# Altium PCB PCB1.PcbDoc (part 1 of 2)
Units mm, origin at the board's own origin, x right, y up, seen from the top; angles counter-clockwise.
Board outline 105 x 110 mm, 4 copper layers (Top Layer, Layer 1, Layer 2, Bottom Layer), stack 0.603 mm thick; 82 components, 77 nets, 297 pads, 49 vias.
Unrouted connection lines stored in the file: 1.
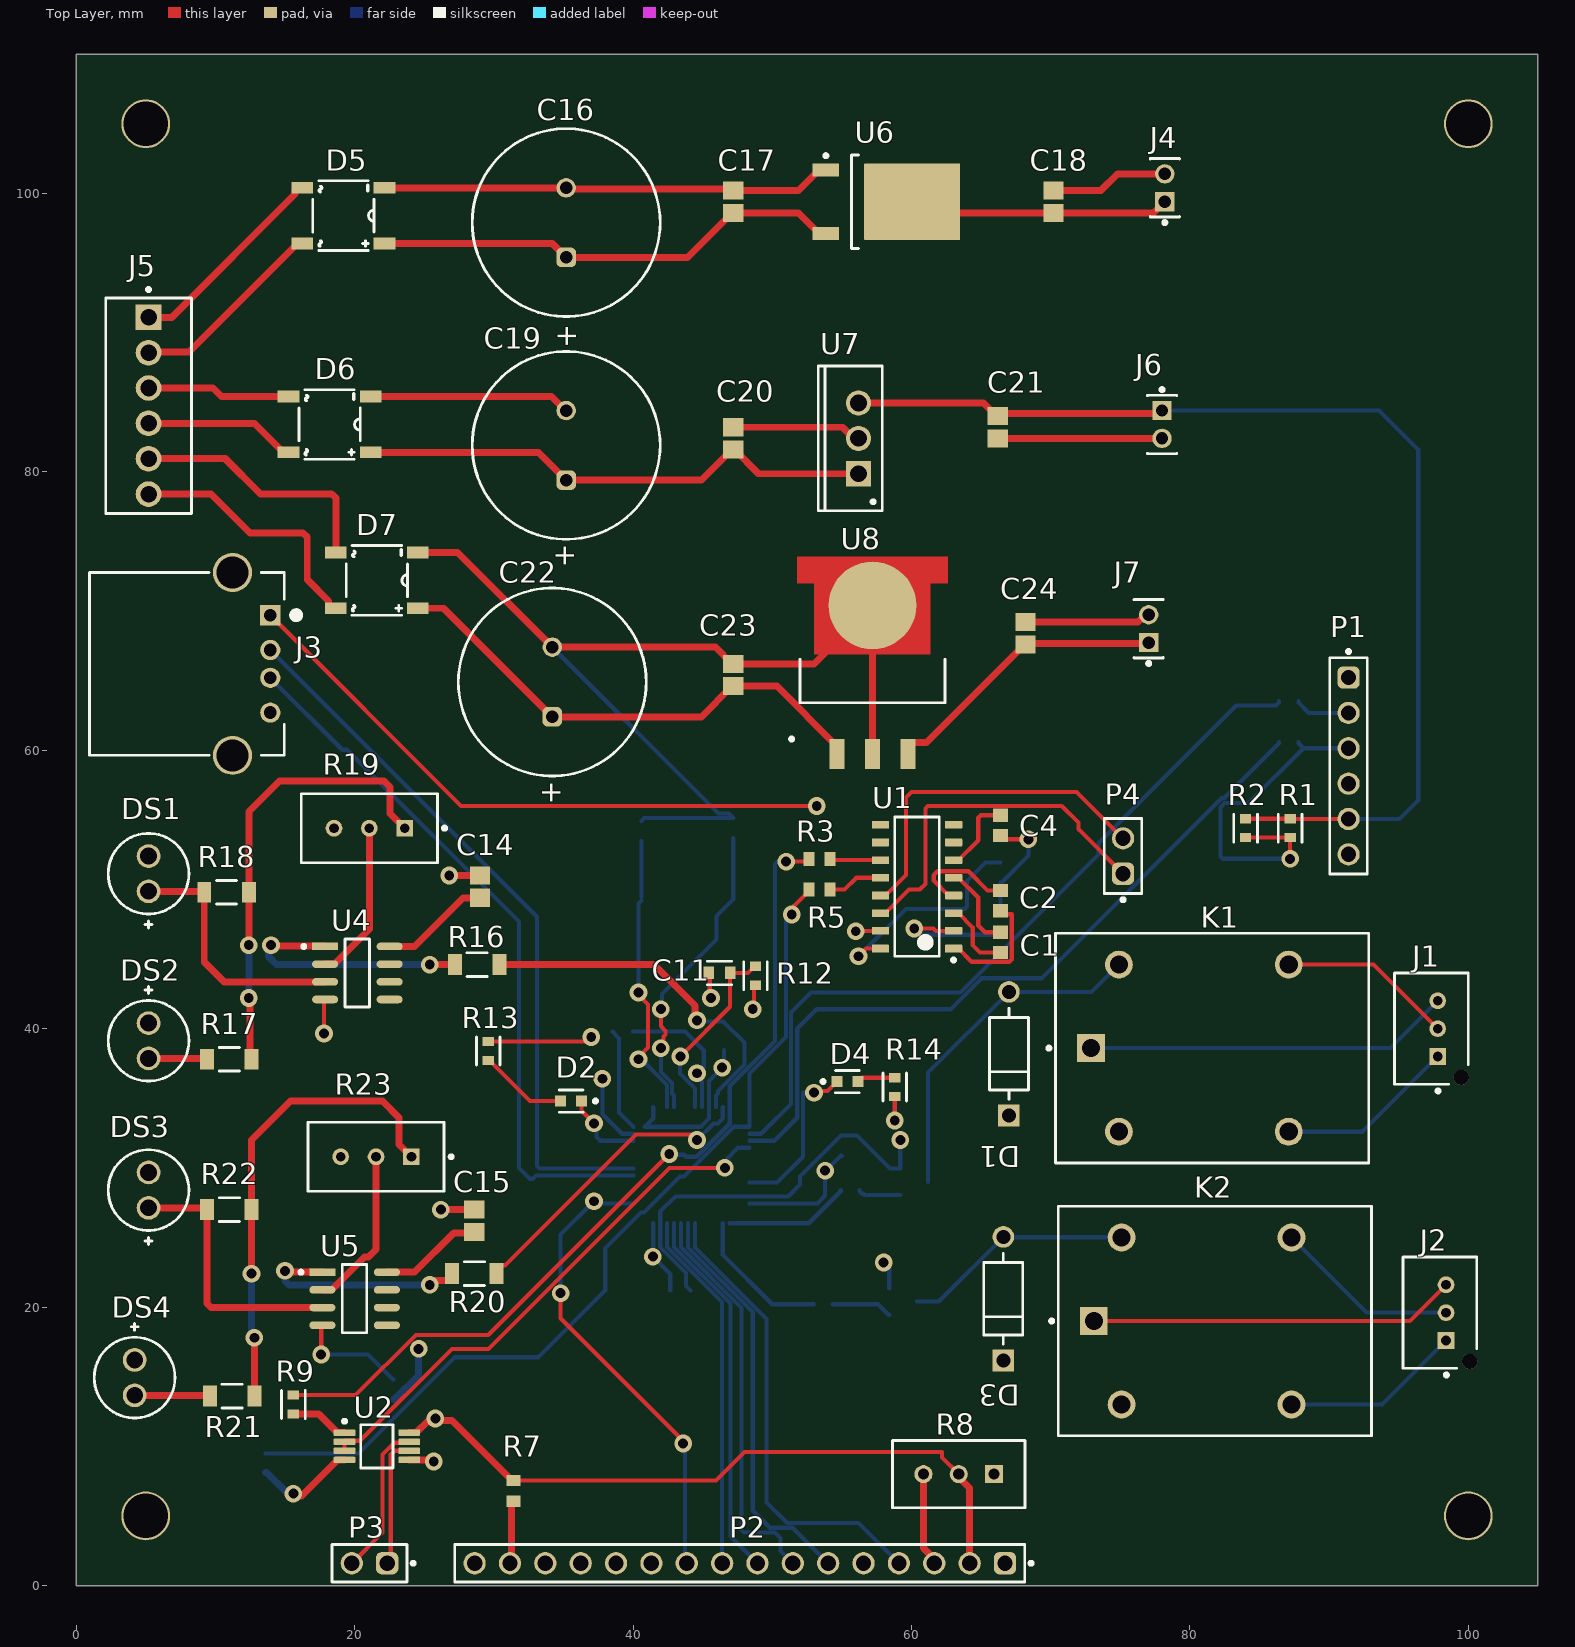
[diagram p0: Top Layer view]
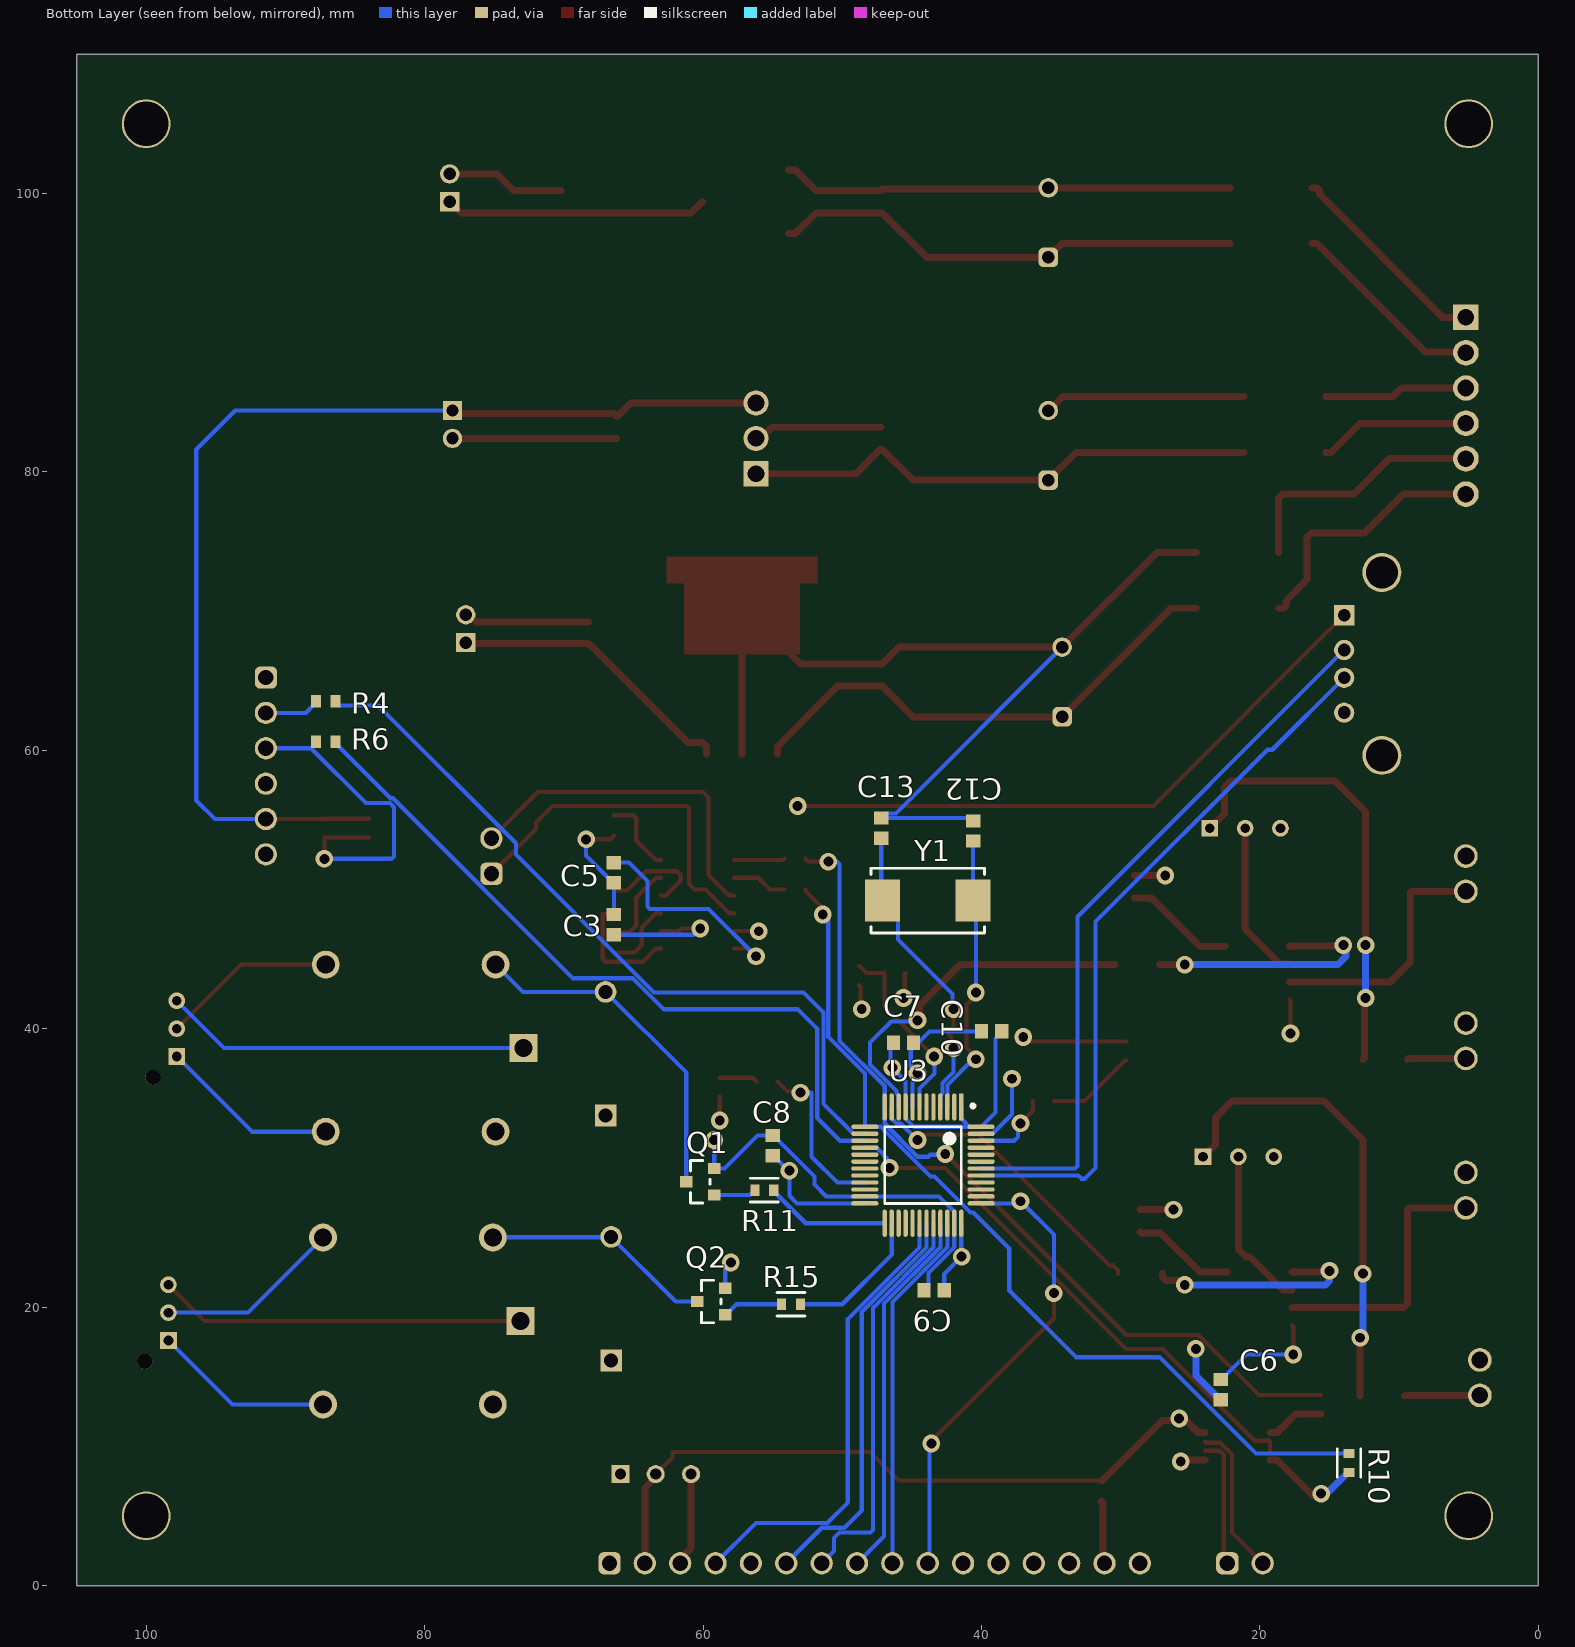
[diagram p1: Bottom Layer view, seen from below]
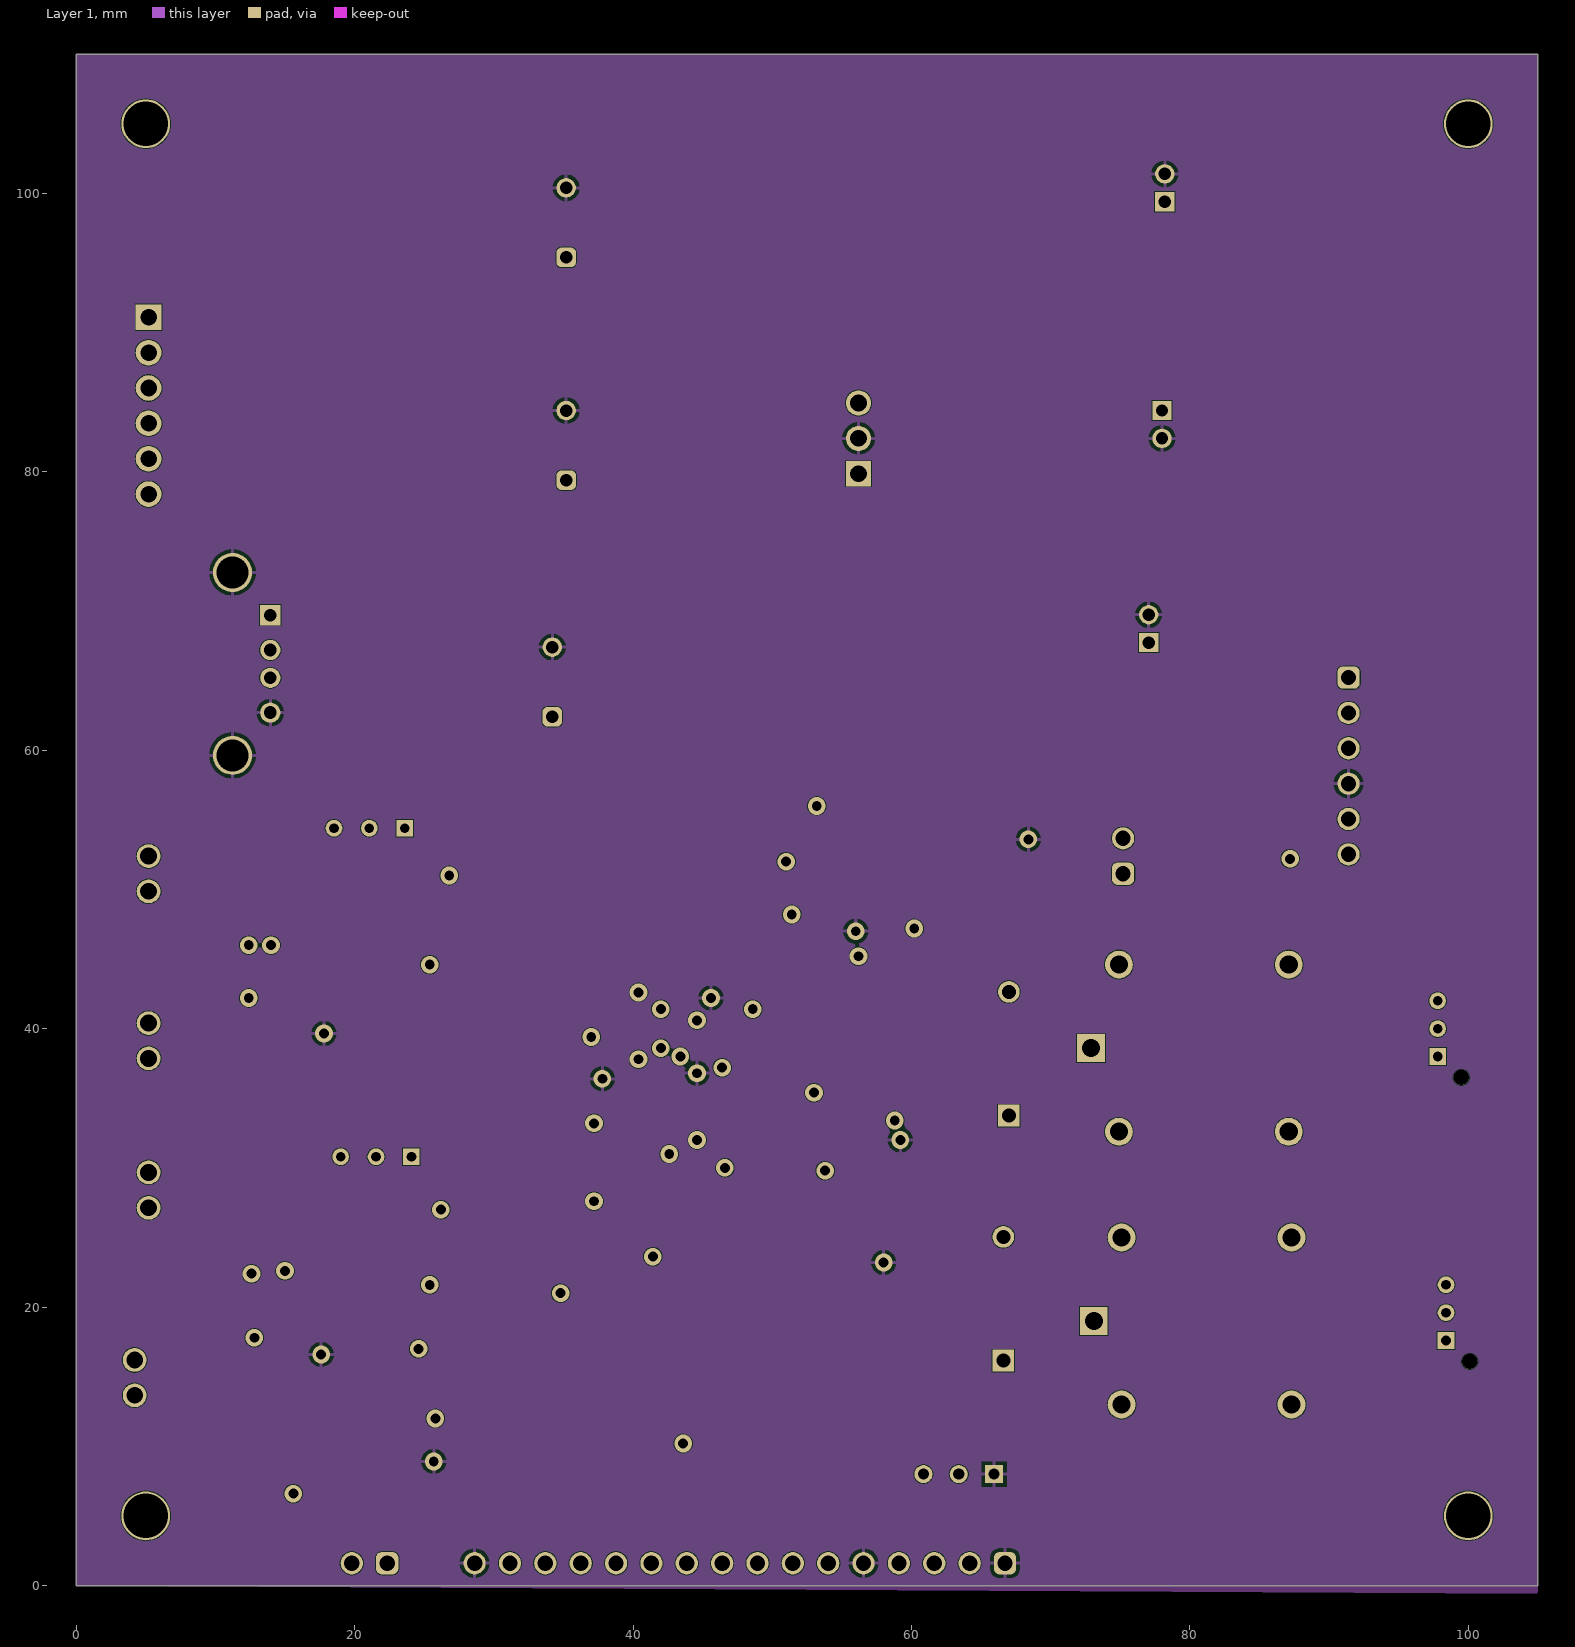
[diagram p2: Layer 1]
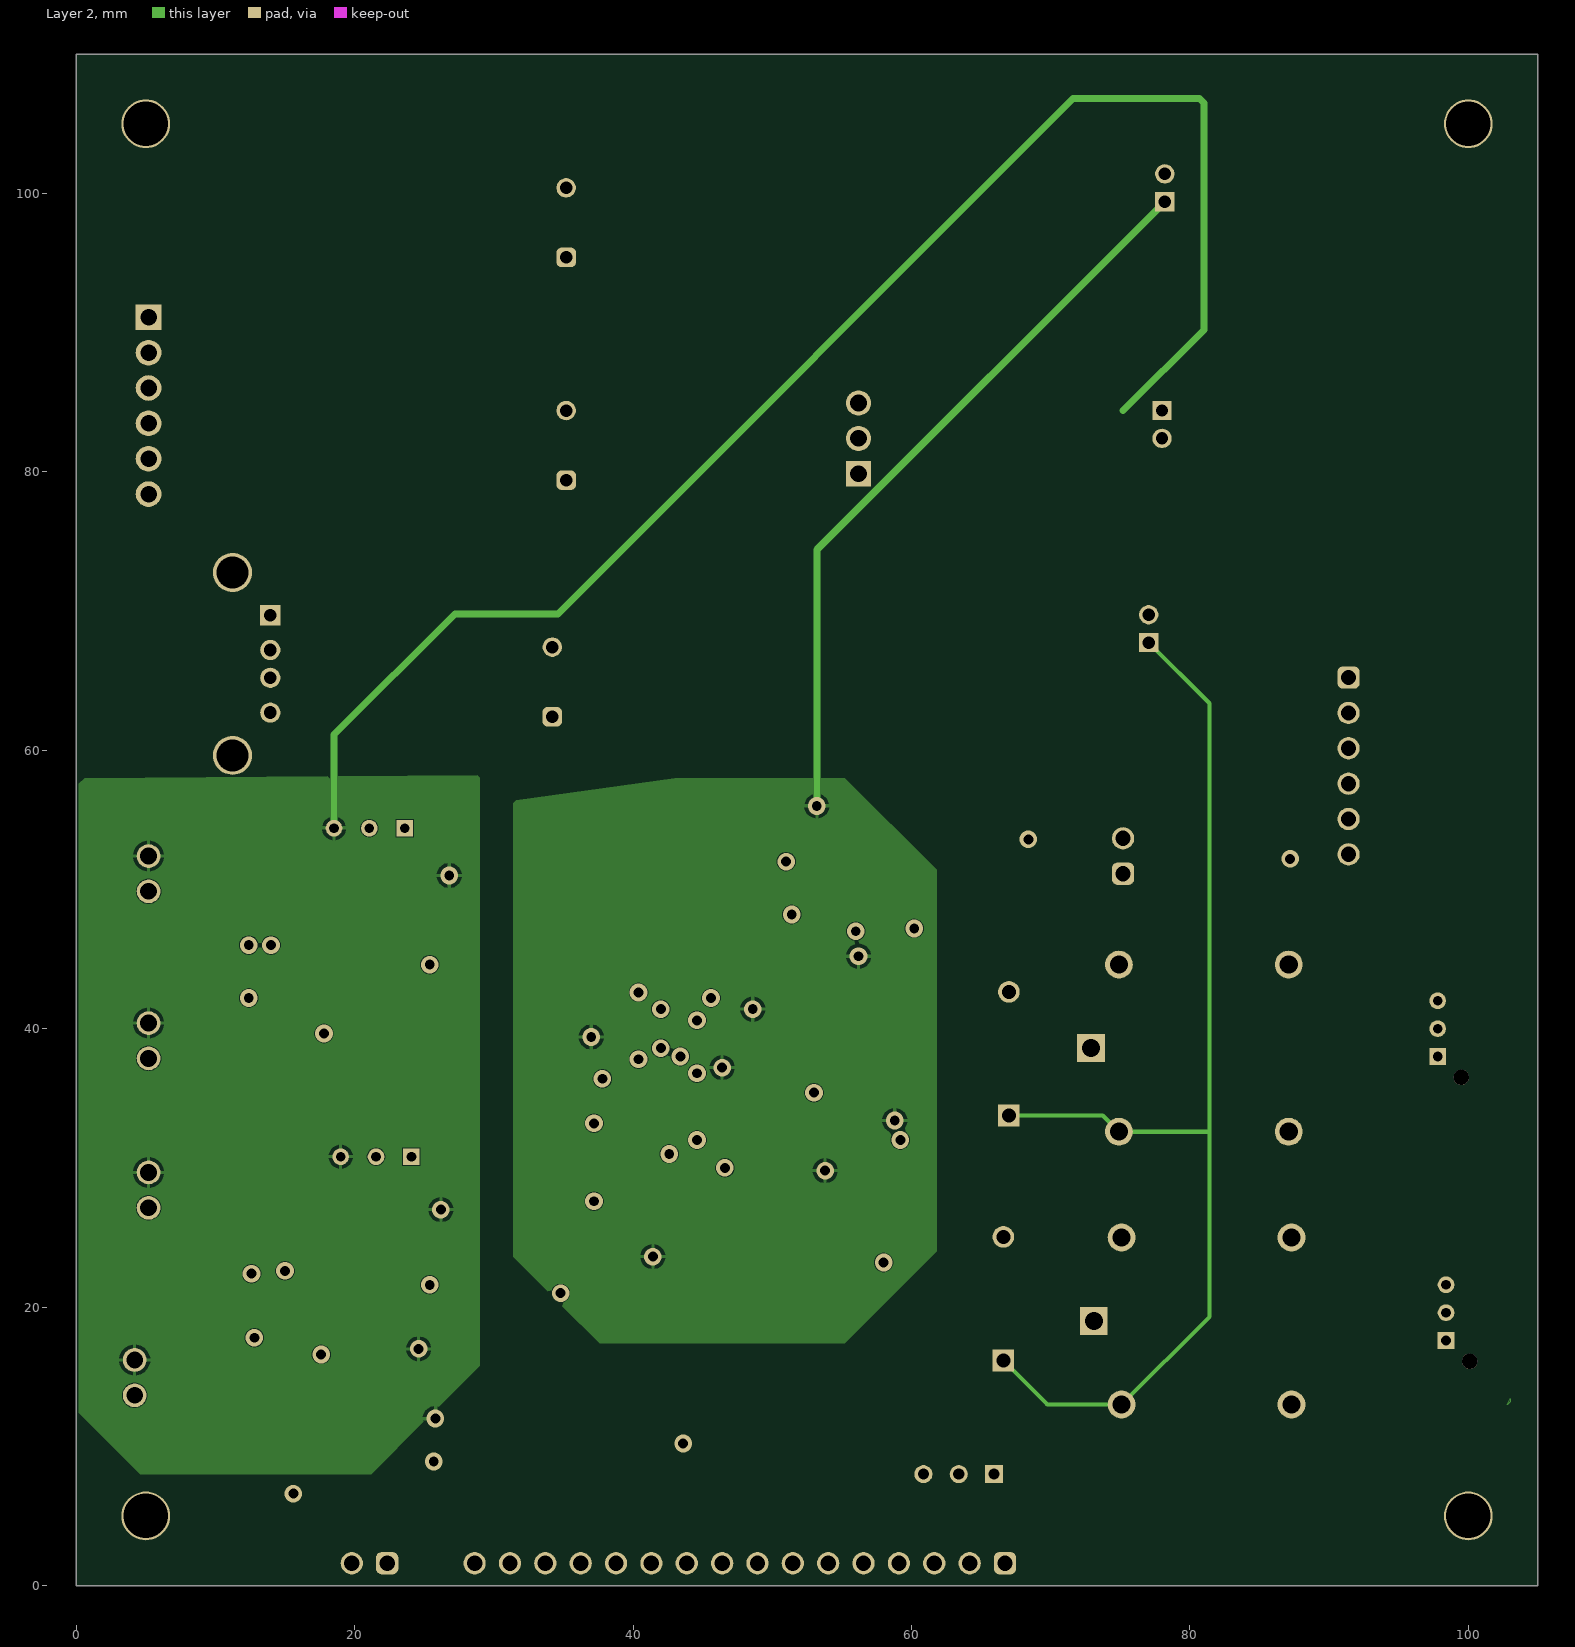
[diagram p3: Layer 2]
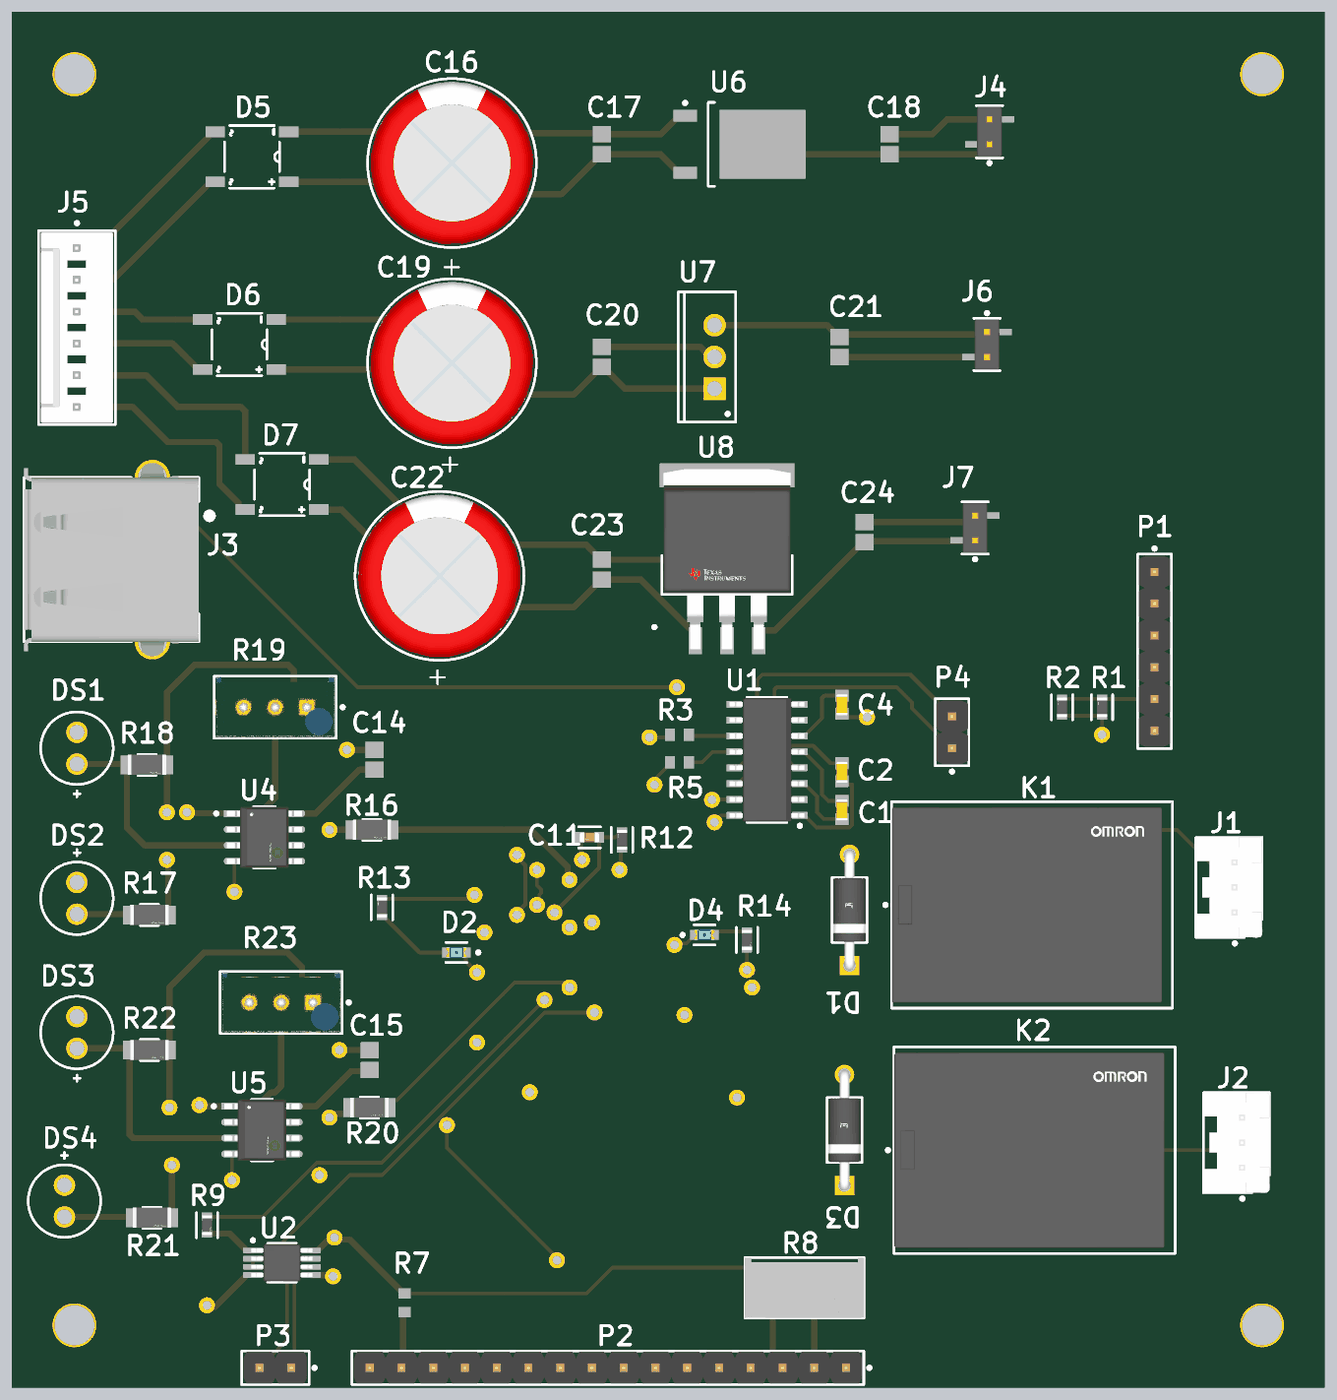
[diagram p4: 3D render of the assembled board from above, using the file's embedded part models]
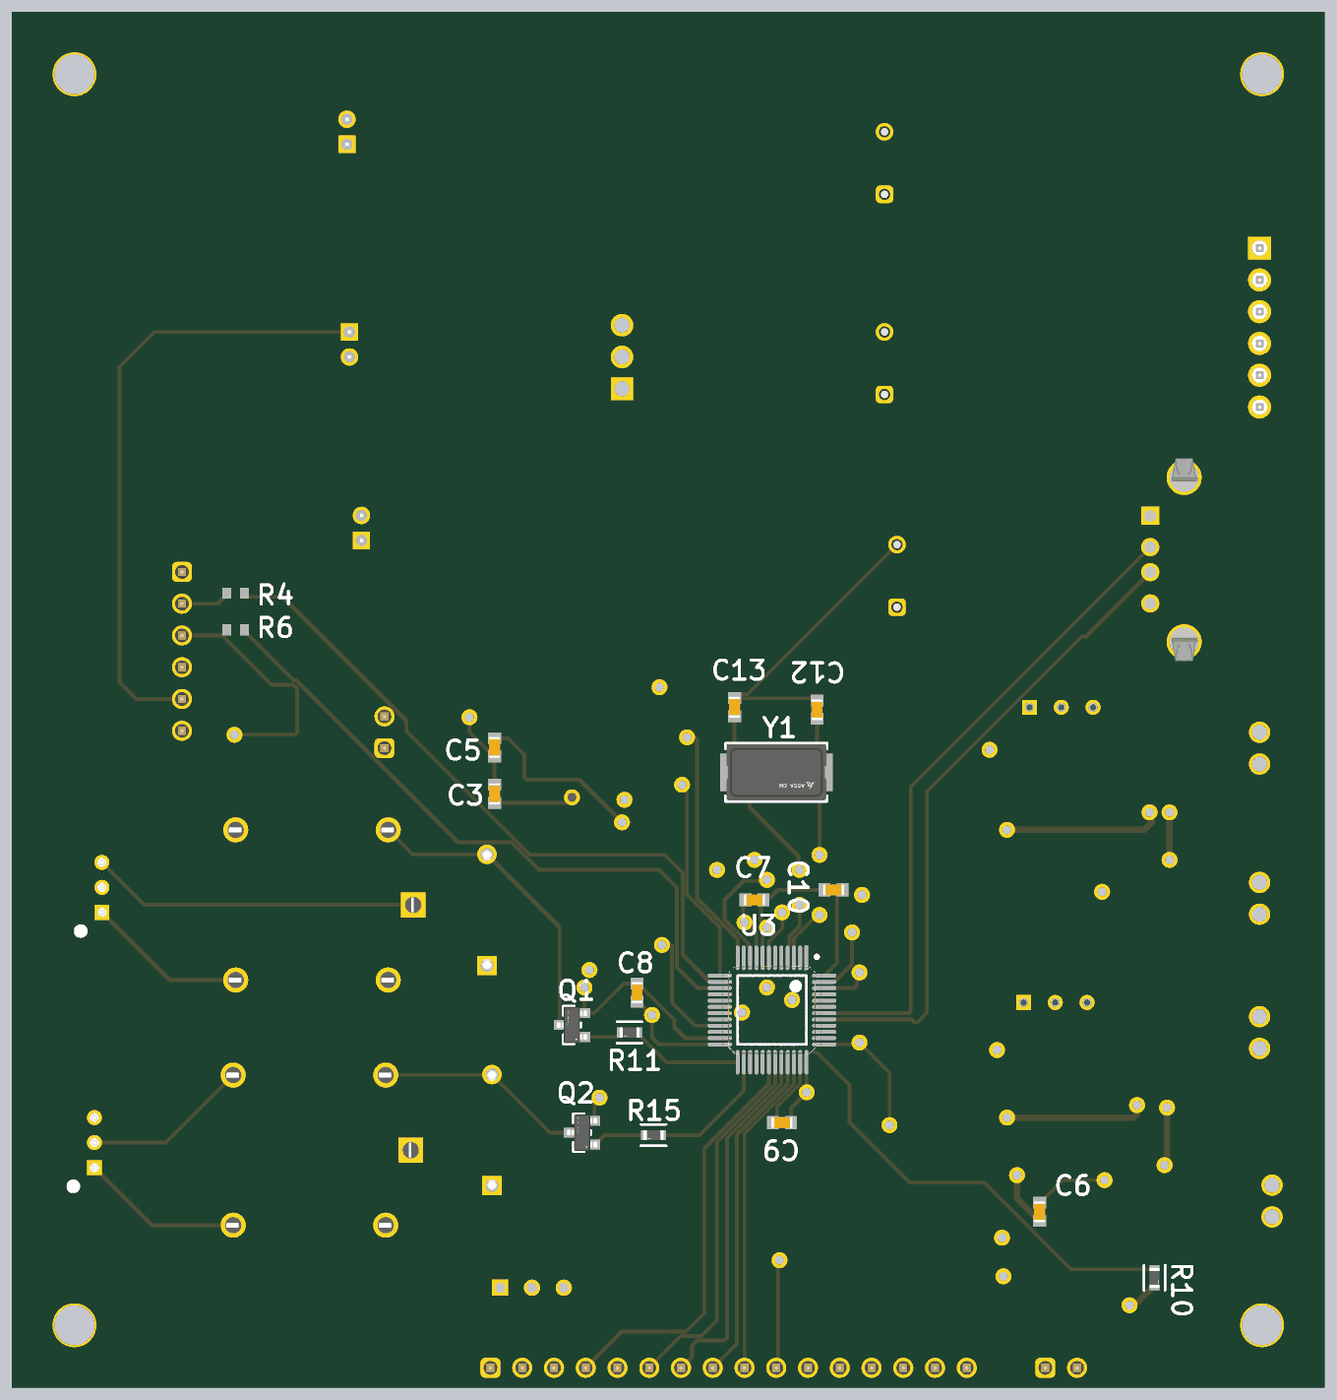
[diagram p5: 3D render of the assembled board from below, using the file's embedded part models]

## Layer stack, top to bottom
Top Solder: solder mask 0.0102, Solder Resist, Dk 3.5
Top Layer: signal copper 0.0356
Dielectric 2: prepreg 0.0711, PP-006, Dk 4.1
Layer 1: signal copper 0.035
Dielectric 1: dielectric 0.32, FR-4, Dk 4.8
Layer 2: signal copper 0.035
Dielectric 3: prepreg 0.0711, PP-006, Dk 4.1
Bottom Layer: signal copper 0.0356
Bottom Solder: solder mask 0.0102, Solder Resist, Dk 3.5

## Board outline
0,0 105,0 105,110 0,110

## Design rules (kind name [scope] priority, off if disabled: settings)
Clearance [All] p1: gap=0.05 ignorepadtopadclearanceinfootprint=FALSE
PlaneConnect [All] p1: planeconnectstyle=Direct reliefexpansion=0.508 reliefentries=4 reliefconductorwidth=0.254 reliefairgap=0.254
PolygonConnect [All] p1: connectstyle=Relief reliefconductorwidth=0.254 reliefentries=4 polygonreliefangle="90 Angle" airgapwidth=0.254
RoutingVias [All] p1: holewidth=0.711 width=1.27 viastyle="Through Hole" minholewidth=0.711 minwidth=1.27 maxholewidth=0.711 maxwidth=1.27
SolderMaskExpansion [All] p1: expansion=0 istentingtop=FALSE
SupplyNets "Schematic Supply Nets_3" [InNet('+12')] p1: voltage=0.000
SupplyNets "Schematic Supply Nets_2" [InNet('+5')] p2: voltage=0.000
SupplyNets "Schematic Supply Nets_1" [InNet('+3.3')] p3: voltage=0.000
SupplyNets "Schematic Supply Nets" [InNet('GND')] p4: voltage=0.000
Width [All] p1: maxlimit=5 minlimit=0.254 preferedwidth=0.5
29 further rules are at their usual default settings.

## Classes and differential pairs
component class "Power Supply": C16 C17 C18 C19 C20 C21 C22 C23 C24 D5 D6 D7 J4 J5 J6 J7 U6 U7 U8
component class "MCU, Relays & USB": C7 C8 C9 C10 C11 C12 C13 D1 D2 D3 D4 J1 J2 J3 K1 K2 Q1 Q2 R11 R12 R13 R14 R15 U3 Y1
component class "Communication & Display": C1 C2 C3 C4 C5 C6 P1 P2 P3 P4 R1 R2 R3 R4 R5 R6 R7 R8 R9 R10 U1 U2
component class "Analog Front-End": C14 C15 DS1 DS2 DS3 DS4 R16 R17 R18 R19 R20 R21 R22 R23 U4 U5

## Components (designator, comment, footprint, x,y, rotation, side; value= is the part's Value field where it differs from the comment)
C1 "0.1uF" CAPC1608X90X35ML10T15 66.4,46.2 r270 top
C2 "0.1uF" CAPC1608X90X35ML10T15 66.4,49.2 r270 top
C3 "0.1uF" CAPC1608X90X35ML10T15 66.4,47.475 r90 bottom
C4 "0.1uF" CAPC1608X90X35ML10T15 66.4,54.6 r270 top
C5 "0.1uF" CAPC1608X90X35ML10T15 66.4,51.2 r90 bottom
C6 "0.1uF" CAPC1608X90X35ML10T15 22.8,14.075 r90 bottom
C7 "0.1uF" CAPC1608X90X35ML10T15 45.6,39 r180 bottom
C8 "0.1uF" CAPC1608X90X35ML10T15 55,31.6 r90 bottom
C9 "0.1uF" CAPC1608X90X35ML10T15 43.4,21.2 r0 bottom
C10 "0.1uF" CAPC1608X90X35ML10T15 39.275,39.8 r0 bottom
C11 "10uF" FP-GRM18-0_15-MFG 46.2,44 r180 top
C12 "22pF" CAPC1608X90X35ML10T15 40.6,54.2 r90 bottom
C13 "22pF" CAPC1608X90X35ML10T15 47.2,54.4 r90 bottom
C14 "0.1uF" CAPC2013X145X50NL20T25 29,50.2 r270 top
C15 "0.1uF" CAPC2013X145X50NL20T25 28.6,26.2 r270 top
C16 "470uF" WCAP-ATLI_D13H25 35.2,97.9 r270 top
C17 "0.IuF" CAPC2013X145X50NL20T25 47.2,99.4 r270 top
C18 "0.1uF" CAPC2013X145X50NL20T25 70.2,99.4 r270 top
C19 "470uF" WCAP-ATLI_D13H25 35.2,81.9 r270 top
C20 "0.1uF" CAPC2013X145X50NL20T25 47.2,82.4 r270 top
C21 "0.1uF" CAPC2013X145X50NL20T25 66.2,83.2 r90 top
C22 "470uF" WCAP-ATLI_D13H25 34.2,64.9 r270 top
C23 "0.1uF" CAPC2013X145X50NL20T25 47.2,65.4 r270 top
C24 "0.1uF" CAPC2013X145X50NL20T25 68.2,68.4 r270 top
D1 "1N4007" FP-1N4007-MFG 67,38.2 r90 top value=15pF
D2 "LTST-C191TBKT" FP-LTST-C191TBKT-MFG 35.55,34.8 r180 top
D3 "1N4007" FP-1N4007-MFG 66.6,20.6 r90 top value=15pF
D4 "LTST-C191TBKT" FP-LTST-C191TBKT-MFG 55.4,36.2 r0 top
D5 "MDB6S" FAIR-MDBXS-4_V 19.2,98.4 r90 top
D6 "MDB6S" FAIR-MDBXS-4_V 18.2,83.4 r90 top
D7 "MDB6S" FAIR-MDBXS-4_V 21.6,72.2 r90 top
DS1 "IR_RX1" VISH-TSAL6200 5.2,51.13 r90 top
DS2 "IR_TX1" VISH-TSAL6200 5.2,39.13 r270 top
DS3 "IR_RX1" VISH-TSAL6200 5.2,28.4 r90 top
DS4 "IR_TX1" VISH-TSAL6200 4.2,14.93 r270 top
J1 "B03B-PASK-1(LF)(SN)" FP-B03B-PASK-1_LF_SN-MFG 97.35,40 r270 top
J2 "B03B-PASK-1(LF)(SN)" FP-B03B-PASK-1_LF_SN-MFG 97.95,19.6 r270 top
J3 "292303-1" TE-292303-1_V 12.8,66.2 r270 top
J4 "TMM-102-03-F-S" FP-TMM-102-03-F-S-MFG 78.2,100.4 r90 top
J5 "22-27-2061" FP-22-27-2061-MFG 5.2,84.75 r270 top
J6 "TMM-102-03-F-S" FP-TMM-102-03-F-S-MFG 78,83.4 r270 top
J7 "TMM-102-03-F-S" FP-TMM-102-03-F-S-MFG 77.042,68.734 r90 top
K1 "G5LE-1-E DC12" FP-G5LE-1-E_DC12-MFG 81.6,38.6 r180 top
K2 "G5LE-1-E DC12" FP-G5LE-1-E_DC12-MFG 81.8,19 r180 top
P1 "61300611121" 61300611121 91.4,58.87 r270 top
P2 "61301611121" 61301611121 47.67,1.6 r180 top
P3 "61300211121" 61300211121 21.07,1.6 r180 top
P4 "61300211121" 61300211121 75.2,52.4 r90 top
Q1 "SBC847CLT1G" FP-318-08-MFG 60.2,29 r0 bottom
Q2 "SBC847CLT1G" FP-318-08-MFG 59.4,20.4 r0 bottom
R1 "10K" FP-RC0603-0_55-IPC_C 87.2,54.4 r90 top
R2 "10K" FP-RC0603-0_55-IPC_C 84,54.4 r90 top
R3 "0E" RESC1608X55X25ML10T15 53.4,52.2 r0 top
R4 "330R" RESC1608X55X25NL10T15 87.1,63.519 r180 bottom
R5 "0E" RESC1608X55X25ML10T15 53.4,50 r0 top
R6 "330R" RESC1608X55X25NL10T15 87.1,60.6 r180 bottom
R7 "0E" RESC1608X55X25ML10T15 31.4,6.8 r270 top
R8 "3296W-1-102LF" BOUR-3296W-1-3 63.4,8 r180 top
R9 "1K" FP-RC0603-0_55-IPC_C 15.6,13 r270 top
R10 "1K" FP-RC0603-0_55-IPC_C 13.6,8.8 r270 bottom
R11 "10K" FP-RC0603-0_55-IPC_C 55.6,28.4 r0 bottom
R12 "1K" FP-RC0603-0_55-IPC_C 48.8,43.8 r90 top
R13 "10K" FP-RC0603-0_55-IPC_C 29.6,38.4 r90 top
R14 "10K" FP-RC0603-0_55-IPC_C 58.8,35.8 r270 top
R15 "10K" FP-RC0603-0_55-IPC_C 53.677,20.2 r0 bottom
R16 "300R" FP-AC1206-MFG 28.8,44.6 r0 top value=6.2KΩ
R17 "100R" FP-AC1206-MFG 11,37.8 r0 top value=6.2KΩ
R18 "1k" FP-AC1206-MFG 10.8,49.8 r0 top value=6.2KΩ
R19 "10k" FP-3296W-MFG 21.06,54.395 r90 top
R20 "300R" FP-AC1206-MFG 28.6,22.4 r0 top value=6.2KΩ
R21 "100R" FP-AC1206-MFG 11.2,13.6 r0 top value=6.2KΩ
R22 "1k" FP-AC1206-MFG 11,27 r0 top value=6.2KΩ
R23 "10k" FP-3296W-MFG 21.54,30.795 r90 top
U1 "MAX3232CDR" D0016A_L 60.4,50.2 r180 top
U2 "SN65HVD3082EDGKR" DGK0008A_M 21.6,10 r0 top
U3 "STM32F030CCT6TR" FP-LQFP48-5B-IPC_A 44.2,30.2 r270 bottom
U4 "LM358DR2G" FP-751-07-IPC_C 20.2,44 r0 top
U5 "LM358DR2G" FP-751-07-IPC_C 20,20.6 r0 top
U6 "LM1117DTX-1.8/NOPB" NDP0003B_N 58.2,99.4 r0 top
U7 "L7805CP" TO220FP 56.2,82.4 r90 top
U8 "LM7812S/NOPB" FP-KTT0003B-MFG 57.2,66.27 r0 top
Y1 "ABM2-14.31818MHZ-D4Y-T" FP-ABM2-MFG 43.85,49.2 r0 bottom

## Footprints (in the part's own frame and the unit in brackets; to place one, negate y for a bottom-side part, rotate by r counter-clockwise, add the part's x,y. Pads: shape width x height; smd on the part's side, far side on the other; paste and mask are expansions set on the pad)
61300211121 [mm] "Pin Header, pitch 2.54 mm, THT, Vertical, single row, 2p"
  rrect50% 1.6x1.6 hole 1.1: 1(-1.27,0)
  round 1.6 hole 1.1: 2(1.27,0)
  silkscreen extent -3.26,-1.35 2.69,1.35, body extent -2.54,-1.27 2.54,1.27, height 8.57
61300611121 [mm] "Pin Header, pitch 2.54 mm, THT, Vertical, single row, 6p"
  rrect50% 1.6x1.6 hole 1.1: 1(-6.35,0)
  round 1.6 hole 1.1: 2(-3.81,0) 3(-1.27,0) 4(1.27,0) 5(3.81,0) 6(6.35,0)
  silkscreen extent -8.34,-1.35 7.77,1.35, body extent -7.62,-1.27 7.62,1.27, height 8.57
61301611121 [mm] "Pin Header, pitch 2.54 mm, THT, Vertical, single row, 16p"
  rrect50% 1.6x1.6 hole 1.1: 1(-19.05,0)
  round 1.6 hole 1.1: 2(-16.51,0) 3(-13.97,0) 4(-11.43,0) 5(-8.89,0) 6(-6.35,0) 7(-3.81,0) 8(-1.27,0) 9(1.27,0) 10(3.81,0) 11(6.35,0) 12(8.89,0) 13(11.43,0) 14(13.97,0) 15(16.51,0) 16(19.05,0)
  silkscreen extent -21.04,-1.35 20.47,1.35, body extent -20.32,-1.27 20.32,1.27, height 8.57
BOUR-3296W-1-3 [mm] "THD, 3-Leads, Body 9.53x4.83mm, Pitch 2.54mm"
  rect 1.3x1.3 hole 0.8: 1(-2.54,0)
  round 1.3 hole 0.8: 2(0,0) 3(2.54,0)
  silkscreen extent -4.76,-2.41 4.76,2.42, body extent -4.76,-2.41 4.76,2.42, height 11.55
CAPC1608X90X35ML10T15 [mm] "Chip Capacitor, 2-Leads, Body 1.7x0.9mm, IPC Low Density"
  rect 0.95x1.05 smd: 1(-0.725,0) 2(0.725,0)
  body extent -0.85,-0.45 0.85,0.45, height 0.9
CAPC2013X145X50NL20T25 [mm] "Chip Capacitor, 2-Leads, Body 2.00x1.25mm, IPC Medium Density"
  rect 1.3x1.45 smd: 1(-0.8,0) 2(0.8,0)
  body extent -1.1,-0.72 1.1,0.72, height 1.45
D0016A_L [mm] "SOIC, 16-Leads, Body 10x4mm, Pitch 1.27mm, IPC High Density"
  rrect18% 1.25x0.55 smd: 1(-2.625,4.445) 2(-2.625,3.175) 3(-2.625,1.905) 4(-2.625,0.635) 5(-2.625,-0.635) 6(-2.625,-1.905) 7(-2.625,-3.175) 8(-2.625,-4.445) 9(2.625,-4.445) 10(2.625,-3.175) 11(2.625,-1.905) 12(2.625,-0.635) 13(2.625,0.635) 14(2.625,1.905) 15(2.625,3.175) 16(2.625,4.445)
  silkscreen extent -2.75,-5 1.6,5.39, body extent -3,-4.95 3,4.95, height 1.59
DGK0008A_M [mm] "TSOP, 8-Leads, Body 3.1x3.1mm, Pitch 0.65mm, IPC Low Density"
  rrect22% 1.55x0.45 smd: 1(-2.325,0.975) 2(-2.325,0.325) 3(-2.325,-0.325) 4(-2.325,-0.975) 5(2.325,-0.975) 6(2.325,-0.325) 7(2.325,0.325) 8(2.325,0.975)
  silkscreen extent -2.45,-1.55 1.15,1.92, body extent -2.45,-1.5 2.45,1.5, height 0.94
FAIR-MDBXS-4_V [mm] "Micro-DIP, 4-Leads, Body 5x4.4mm, Height 1.6mm"
  rect 0.85x1.55 smd: 1(-2,-2.95) 2(2,-2.95) 3(2,2.95) 4(-2,2.95)
  silkscreen extent -2.5,-2.2 2.5,2.2, body extent -2.5,-2.2 2.5,2.2, height 1.6
FP-1N4007-MFG [mm]
  rect 1.55x1.55 hole 1 paste-2539.97 mask+0: 1(-4.44,0)
  round 1.55 hole 1 paste-2539.97 mask+0: 2(4.44,0)
  silkscreen extent -3.26,-1.4 3.26,1.4, body extent -4.83,-1.29 4.83,1.29, height 2.6
FP-22-27-2061-MFG [mm]
  rect 1.84x1.84 hole 1.19 paste-2539.97 mask+0: 1(-6.35,0)
  round 1.84 hole 1.19 paste-2539.97 mask+0: 2(-3.81,0) 3(-1.27,0) 4(1.27,0) 5(3.81,0) 6(6.35,0)
  silkscreen extent -8.47,-3.08 7.75,3.08, body extent -7.85,-3.18 7.85,3.17, height 0.25
FP-318-08-MFG [mm]
  rect 0.9x0.8 smd paste+0 mask+0: 1(-1,0.95) 2(-1,-0.95) 3(1,0)
  silkscreen extent -0.7,-1.52 0.7,1.52, body extent -1.2,-1.45 1.2,1.45, height 1.11
FP-751-07-IPC_C [mm]
  rect 1.874x0.543 smd paste+0 mask+0: 1(-2.316,1.905)
  rrect100% 1.874x0.543 smd paste+0 mask+0: 2(-2.316,0.635) 3(-2.316,-0.635) 4(-2.316,-1.905) 5(2.316,-1.905) 6(2.316,-0.635) 7(2.316,0.635) 8(2.316,1.905)
  silkscreen extent -3.98,-2.45 0.88,2.45, body extent -3.35,-2.55 3.35,2.55, height 0.25
FP-3296W-MFG [mm]
  rect 1.2x1.2 hole 0.7 paste-2539.97 mask+0: 1(0.005,-2.54)
  round 1.2 hole 0.7 paste-2539.97 mask+0: 2(0.005,0) 3(0.005,2.54)
  silkscreen extent -2.48,-5.53 2.48,4.89, body extent -2.58,-4.99 2.58,4.99, height 0.25
FP-ABM2-MFG [mm]
  rect 2.5x3 smd paste+0 mask+0: 1(-3.25,0) 2(3.25,0)
  silkscreen extent -4.08,-2.32 4.08,2.32, body extent -4,-2.25 4,2.25, height 1.81
FP-AC1206-MFG [mm]
  rect 1x1.5 smd paste+0 mask+0: 1(-1.6,0) 2(1.6,0)
  silkscreen extent -0.72,-0.85 0.72,0.85, body extent -2.2,-0.95 2.2,0.95, height 0.25
FP-B03B-PASK-1_LF_SN-MFG [mm]
  rect 1.2x1.2 hole 0.7 paste-2539.97 mask+0: 1(2,0.45)
  round 1.2 hole 0.7 paste-2539.97 mask+0: 2(0,0.45) 3(-2,0.45)
  round 1.1 hole 1.1 unplated paste-2539.97 mask+0: ""(3.5,2.15)
  silkscreen extent -4,-2.65 4.6,2.65, body extent -4,-2.65 4,2.65, height 7.7
FP-G5LE-1-E_DC12-MFG [mm]
  rect 2x2 hole 1.3 paste-2539.97 mask+0: 1(8.7,0)
  round 2 hole 1.3 paste-2539.97 mask+0: 2(6.7,6) 3(-5.5,6) 4(-5.5,-6) 5(6.7,-6)
  silkscreen extent -11.25,-8.25 11.85,8.25, body extent -10.4,-7.8 11.2,7.8, height 19
FP-GRM18-0_15-MFG [mm]
  rect 0.75x0.9 smd paste+0 mask+0: 1(-0.775,0) 2(0.775,0)
  silkscreen extent -0.88,-0.83 0.87,0.85, body extent -1.25,-0.58 1.25,0.58, height 0.25
FP-KTT0003B-MFG [mm]
  rect 1.07x2.16 smd paste+0 mask+0: 1(-2.54,-6.545) 2(0,-6.545) 3(2.54,-6.545)
  round 6.291 smd paste+0 mask+0: 4(0,4.13)
  Top Layer region: 5.4,7.625 -5.4,7.625 -5.4,5.715 -4.165,5.715 -4.165,0.635 4.165,0.635 4.165,5.715 5.4,5.715 5.4,7.625
  silkscreen extent -5.93,-5.59 5.21,0.26, body extent -5.5,-7.73 5.5,7.73, height 0.25
FP-LQFP48-5B-IPC_A [mm]
  rect 1.955x0.312 smd paste+0 mask+0: 1(-4.175,2.75)
  rrect100% 1.955x0.312 smd paste+0 mask+0: 2(-4.175,2.25) 3(-4.175,1.75) 4(-4.175,1.25) 5(-4.175,0.75) 6(-4.175,0.25) 7(-4.175,-0.25) 8(-4.175,-0.75) 9(-4.175,-1.25) 10(-4.175,-1.75) 11(-4.175,-2.25) 12(-4.175,-2.75) 25(4.175,-2.75) 26(4.175,-2.25) 27(4.175,-1.75) 28(4.175,-1.25) 29(4.175,-0.75) 30(4.175,-0.25) 31(4.175,0.25) 32(4.175,0.75) 33(4.175,1.25) 34(4.175,1.75) 35(4.175,2.25) 36(4.175,2.75)
  rrect100% 0.312x1.955 smd paste+0 mask+0: 13(-2.75,-4.175) 14(-2.25,-4.175) 15(-1.75,-4.175) 16(-1.25,-4.175) 17(-0.75,-4.175) 18(-0.25,-4.175) 19(0.25,-4.175) 20(0.75,-4.175) 21(1.25,-4.175) 22(1.75,-4.175) 23(2.25,-4.175) 24(2.75,-4.175) 37(2.75,4.175) 38(2.25,4.175) 39(1.75,4.175) 40(1.25,4.175) 41(0.75,4.175) 42(0.25,4.175) 43(-0.25,4.175) 44(-0.75,4.175) 45(-1.25,4.175) 46(-1.75,4.175) 47(-2.25,4.175) 48(-2.75,4.175)
  silkscreen extent -4.38,-2.75 2.75,3.71, body extent -4.5,-4.5 4.5,4.5, height 1.6
FP-LTST-C191TBKT-MFG [mm]
  rect 0.8x0.8 smd paste+0 mask+0: 1(-0.75,0) 2(0.75,0)
  silkscreen extent -1.88,-0.8 0.85,0.8, body extent -1.25,-0.55 1.25,0.55, height 0.25
FP-RC0603-0_55-IPC_C [mm]
  rect 0.659x0.812 smd paste+0 mask+0: 1(-0.677,0) 2(0.677,0)
  silkscreen extent -1.01,-0.85 1.01,0.85, body extent -1.11,-0.55 1.11,0.55, height 0.25
FP-TMM-102-03-F-S-MFG [mm]
  rect 1.39x1.39 hole 0.89 paste-2539.97 mask+0: 1(-1,0)
  round 1.39 hole 0.89 paste-2539.97 mask+0: 2(1,0)
  silkscreen extent -2.62,-1.05 2.1,1.05, body extent -2.1,-2.07 2.1,2.07, height 0.25
NDP0003B_N [mm] "D-PAK, 4-Leads, Body 6.1x6.6mm, Pitch 2.29mm, Lead Span 9.7mm, IPC Medium Density"
  rrect11% 1.9x0.95 smd: 1(-4.35,2.28) 3(-4.35,-2.28)
  rrect2% 6.9x5.5 smd: 4(1.85,0)
  silkscreen extent -4.47,-3.35 -2,3.43, body extent -2.5,-3.35 3.7,3.35, height 2.38
RESC1608X55X25ML10T15 [mm] "Chip Resistor, 2-Leads, Body 1.60x0.80mm, IPC Low Density"
  rect 0.8x1 smd: 1(-0.75,0) 2(0.75,0)
  body extent -0.85,-0.45 0.85,0.45, height 0.55
RESC1608X55X25NL10T15 [mm] "Chip Resistor, 2-Leads, Body 1.70x0.90mm, IPC Medium Density"
  rect 0.7x0.9 smd: 1(-0.7,0) 2(0.7,0)
  body extent -0.85,-0.45 0.85,0.45, height 0.55
TE-292303-1_V [mm] "THD, 4-Leads, Body 13.13x14mm, Pitch 2.5mm"
  rect 1.45x1.45 hole 0.92: 1(-3.5,1.144)
  round 1.45 hole 0.92: 2(-1,1.144) 3(1,1.144) 4(3.5,1.144)
  round 2.8 hole 2.3: 5(-6.57,-1.566) 6(6.57,-1.566)
  silkscreen extent -6.57,-11.85 6.57,3.25, body extent -8.12,-11.85 8.12,2.15, height 7.72
TO220FP [mm] "TO, Thru-Hole, Vertical, Heatsink Mounted; 3 In-Line Leads; Pitch 2.54 mm"
  rect 1.8x1.8 hole 1.2: 1(-2.54,0)
  round 1.8 hole 1.2: 2(0,0) 3(2.54,0)
  silkscreen extent -5.2,-1.7 5.2,2.9, body extent -5.25,-1.75 5.25,2.95, height 20
VISH-TSAL6200 [mm] "THD, 2-Leads, Dia 5.8mm, Pitch 2.54mm"
  round 1.7 hole 1.2: 1(-1.27,0) 2(1.27,0)
  silkscreen extent -3.9,-2.9 2.9,2.9
WCAP-ATLI_D13H25 [mm] "Aluminum Electrolytic Capacitors, 13x25mm"
  rrect50% 1.4x1.4 hole 0.9: 1(2.5,0)
  round 1.4 hole 0.9: 2(-2.5,0)
  silkscreen extent -6.75,-6.75 6.75,6.75, body extent -6.49,-6.5 6.5,6.5, height 25.31

## Part data
C1 C2 C3 C4 C5 C6 C7 C8 C9 C10: library part CMP-2100-03643-1, "Chip Capacitor, 0.1 uF, +/- 10%, 50 V, -55 to 125 degC, 0603 (1608 Metric), RoHS, Tape and Reel", Capacitance=100nF, Case Code (Imperial)=0603, Case Code (Metric)=1608, Dielectric=X7R, Dielectric Material=Ceramic, Insulation Resistance=10GR, Manufacturer=Murata, Max Operating Temperature=125degC, Min Operating Temperature=-55degC, Package Description="2-Pin Surface Mount Device, Body 1.6 x 0.8 mm", Package Quantity=1, Tolerance=10%, Voltage=50V, Case/Package=0603, Contact Plating=Tin, Datasheet URL=http://psearch.en.murata.com/capacitor/product/GRM188R71H104KA93%23.pdf, Datasheet Version=42675.0, Depth=0.8mm, Height=0.8mm, Lead Free=LeadFree, Length=1.6mm, Manufacturer URL=http://www.murata.com/, Material=Ceramic, Mount=SurfaceMount, Number of Pins=2, Package Reference=0603, Packaging=TapeandReel, Radiation Hardening=No, REACH SVHC=NoSVHC, RoHSCompliant=true, Termination=SMD/SMT, Thickness=0.035inch, Voltage Rating=50V, Voltage Rating (DC)=50V, Width=0.8mm
C11: library part CMP-2000-05448-2, "CAP CER 10UF 10V X5R 0603", Manufacturer=Murata, Manufacturer Part Number=GRM188R61A106KE69D, Package=GRM18-0.15, Temperature="-55°C to +85°C", Temperature Characteristic=X5R, Temperature Coefficient=15%, Temperature Range High=+85°C, Temperature Range Low=-55°C, Tolerance=10%, Voltage Rating=10V, Automotive=No, Capacitance=10uF, Category=Cap, ComponentLink2Description=Datasheet, ComponentLink2URL=https://search.murata.co.jp/Ceramy/image/img/A01X/G101/ENG/GRM188R61A106KE69-01A.pdf, Device Class L1="Passive Components", Device Class L2=Capacitors, Device Class L3="Ceramic Capacitors", Digikey Description="CAP CER 10UF 10V X5R 0603", Height=0.95mm, Lead Free=Yes, Material=Ceramic, Mouser Description="Multilayer Ceramic Capacitors MLCC - SMD/SMT 0603 10uF 10volts X5R + - 10%", Octopart=https://octopart.com/grm188r61a106ke69d-murata-22851381, RoHS=TRUE
C12 C13: library part CMP-2000-04945-1, "Chip Capacitor, 22 pF, +/- 5%, 50 V, -55 to 125 degC, 0603 (1608 Metric), RoHS, Tape and Reel", Case Size/Dimension=0603, Dielectric=C0G, Manufacturer=Murata, Package Description="2-Pin Surface Mount Device, Body 1.6 x 0.8 mm", Package Reference=603, Rated Voltage=50V, Tolerance (%)=±5%, Capacitance=22pF, Datasheet URL=https://datasheet.ciiva.com/11786/0900766b807a1cab-11786398.pdf, Datasheet Version=Jul-06, Manufacturer URL=http://www.murata.com/
C14 C15 C17 C18 C20 C21 C23 C24: library part CMP-2007-01227-1, Manufacturer=Kemet, Part Number=C0805S104K5RACTU
C16 C19 C22: library part CMP-03913-54218056-2, "Cap, 2700Uf, 16V, Alu Elec, Radial Rohs Compliant: Yes", Capacitance=2.7mF, Case/Package=Radial, Leakage Current=432µA, Max Operating Temperature=105°C, Min Operating Temperature=-55°C, Ripple Current=3A, Tolerance=20%, Voltage Rating=16V, Diameter=13mm, Height - Seated (Max)=26.4922mm, Impedance=22mΩ, Lead Pitch=5.0038mm, Length=25mm, Life (Hours)=5000hours, Mount="Through Hole", Packaging="Tape & Box (TB)", Pitch=5mm, Polarity=Polar, RoHS=Compliant
D1 D3: library part CMP-123542-000001-1, "Rectifier diode 1000 V 1 A DO-41, ,", Capacitance=15pF, Forward Current=1A, Manufacturer=Diotec, Max Junction Temp=+175°C, Max Repetitive Reverse Voltage=1000V, Max Surge Forward Current=27A, Peak Reverse Current=5uA, Temperature="-50°C to +175°C", Temperature Range Low=-50°C, Automotive=No, Category=Diode, ComponentLink2Description=Datasheet, ComponentLink2URL=https://datasheet.octopart.com/1N4007-Diotec-datasheet-62346875.pdf, Device Class L1="Discrete Semiconductors", Device Class L2=Diodes, Device Class L3="Rectifier Diodes", Height=2.8mm, Ipc Land Pattern Name=DIOAD888W100L520D280, Lead Free=Yes, Manufacturer Part Number=1N4007, Octopart=https://octopart.com/1n4007-diotec-4040411, Package=1N4007, Reverse Voltage=1000V, RoHS=TRUE, Temperature Range High=+175°C
D2 D4: library part CMP-22017-000008-1, "LED BLUE CLEAR CHIP SMD", Case Code (Imperial)=0603, Case Code (Metric)=1608, Color=Blue, Forward Current=20mA, Forward Voltage=3.8V, Lens Color=Colorless, Max Operating Temperature=80°C, Max Power Dissipation=75mW, Min Operating Temperature=-20°C, Package Quantity=1, Power Dissipation=76mW, Reverse Voltage=5V, Case/Package=0603, Depth=1.6mm, Dominant Wavelength=475nm, Height=0.55mm, Illumination Color=Blue, Lead Free="Lead Free", Length=0.8mm, Lens Style=Diffused, Lens Transparency=Clear, Luminous Intensity=180mcd, Mount="Surface Mount", Number of Elements=1, Number of LEDs=1, Number of Pins=2, Packaging="Tape and Reel", Radiation Hardening=No, Test Current=20mA, Viewing Angle=130°, Wavelength=468nm, Width=0.8mm
D5 D6 D7: library part CMP-0950-00003-1, "600 V, 1 A, Single-Phase Bridge Rectifier, -55 to 150 degC, 4-Pin 5 x 4.4 x 1.6 mm MicroDIP, RoHS, Tape and Reel", Manufacturer="Fairchild Semiconductor", Temp. Range="-55 to 150 degC", CJ="10 pF", ComponentLink1Description="Manufacturer URL", ComponentLink1URL=http://www.fairchildsemi.com/, ComponentLink2Description=Datasheet, ComponentLink2URL=http://www.fairchildsemi.com/ds/MD/MDB10S.pdf, DatasheetVersion="Rev. 1.2.1", IF (AV)="1 A", IFSM="30 A", IR="10 uA", Mounting Technology="Surface Mount", PackageDescription="4-Pin Micro Surface Mount, Body 5 x 4.4 mm, Height 1.6 mm", PackageReference=MDBXS-4, Packing="Tape and Reel", PartNumber=MDB6S, RoHS=TRUE, VF="1.1 V", VRRM="600 V"
DS1 DS2 DS3 DS4: library part CMP-2000-07327-1, "High Power Infrared Emitting Diode, GaAlAs, MQW, 1.35 V, 100 mA, -40 to 85 degC, 2-Pin THD, RoHS, Bulk", Forward Current=100mA, Forward Voltage=3V, Manufacturer=Vishay, Operating Temp Range=-40Cto85C, Operating Temperature Classification=Industrial, Package Description="2-Pin Through Hole Device, Dia 5.8 mm, Pitch 2.54 mm", Package Reference=TSAL6200, Package Type=T-13/4, Power Dissipation=160W, Reverse Voltage=5V, Chip Material=GaAlAs, Datasheet URL=http://www.vishay.com/docs/81010/tsal6200.pdf, Datasheet Version="Rev. 2.4, 03/2014", DELETED=Compliant, High Brightness=Yes, Lens Dimensions=5x5x7.7mm, Lens Type=Colored, Lum Intensity=500mW/srmcd, Luminous Intensity=500mW/sr, Main Category=IrLED, Manufacturer URL=http://www.vishay.com/, Mounting=ThroughHole, Mounting Technology=ThroughHole, Number of  Elements=1, Packaging=Bulk, Peak Wavelength=950nm, Pin Count=2, Product Depth (mm)=5.8mm, Product Height (mm)=8.7mm, Product Length (mm)=5.8mm, Rad Hardened=No, Shape Type=Circular, Test Current (It)=100mA, Type=IrLED, Viewing Angle=34deg
J1 J2: library part CMP-17439-000193-1, "CONN HEADER VERT 3POS 2MM", Color=Natural, Current Rating=3A, Flammability Rating="UL94 V-0", Housing Color=White, Voltage Rating=250V, Connector Type=Header, Contact Finish - Mating=TIN, Contact Material="Copper Alloy", Contact Mating Length=0.126inch, Contact Plating=Tin, Contact Shape=Square, Contact Type="Male Pin", Fastening Type=Ramp, Insulation Color=Natural, Insulation Material=PBT, Lead Free="Lead Free", Mated Stacking Heights=14.9mm, Mount="Through Hole", Number of Contacts=3, Number of Positions=3, Number of Rows=1, Orientation=Straight, Packaging=Bulk, Pitch=2mm, Series=PA, Termination=Solder
J3: library part CMP-2000-05404-1, "1 Port Right Angle Through Hole Mount Female Type A USB Connector, 4 Position, -55 to 85 degC, RoHS, Tube", Manufacturer="TE Connectivity", Package Description="4-Pin Through Hole Device, Body 14 x 13.13 mm, Pitch 2.5 mm", Connector Mounting=PCB, Connector Type=USBA, Contact Material=Copper, Contact Plating=Gold, Contact Termination Type=Solder, Datasheet URL=http://www.farnell.com/cad/1653030.pdf, Datasheet Version=Feb-12, Gender=Receptacle, Manufacturer URL=http://www.te.com/, No. of Contacts=4, Package Reference=292303-1, SVHC=NoSVHC(16-Jun-2014)
J4 J6 J7: library part CMP-02766-001614-1, "CONN HEADER VERT 2POS 2MM", Contact Plating=Gold, Gender=Male, Lead Free="Lead Free", Mount="Through Hole", Number of Contacts=2, Number of Rows=1, Packaging=Bulk, Pitch=2mm, Radiation Hardening=No, RoHS Compliant=Yes, Termination=Solder
J5: library part CMP-04776-000309-1, "CONN HEADER VERT 6POS 2.54MM", Color=Natural, Contact Resistance=10mR, Current Rating=4A, Flammability Rating="UL94 V-0", Housing Color=White, Max Operating Temperature=75°C, Max Voltage Rating (AC)=250V, Min Operating Temperature=0°C, Package Quantity=10000, Connector Type="Male Pin", Contact Material=Brass, Contact Mating Length=0.295inch, Contact Plating=Tin, Contact Type="Male Pin", Depth=5.8mm, Fastening Type=Friction, Gender=Male, Hole Diameter=1.02mm, Housing Material=Nylon, Lead Pitch=2.54mm, Length=15.24mm, Material=Nylon, Max Current Rating=4A, Mount="Through Hole", Number of Contacts=6, Number of Positions=6, Number of Rows=1, Orientation=Straight, Packaging=Bulk, Pitch=2.54mm, Radiation Hardening=No, REACH SVHC="No SVHC", Series=KK, Termination=Solder, Voltage Rating=250V, Voltage Rating (AC)=250V, Working Voltage=250V
K1 K2: library part CMP-08822-000240-1, "RELAY GEN PURPOSE SPDT 16A 12V", Coil Current=33.3mA, Coil Power=400mW, Coil Resistance=360R, Coil Voltage (DC)=12V, Contact Current Rating=16A, Max Operating Temperature=85°C, Max Voltage Rating (AC)=250V, Min Operating Temperature=-40°C, Package Quantity=100, Application(s)=POWER, Coil Type=Non-Latching, Contact Material=Tin, Depth=16.5mm, Height=19mm, Lead Free="Lead Free", Length=22.5mm, Life (Hours)=1000000Hour, Max Current Rating=16A, Mount="Through Hole", Number of Pins=5, Operate Time=10ms, Packaging=Tray, Power Consumption=400mW, Relay Type="General Purpose", Release Time=5ms, Series=G5LE-E, Termination=Solder, Throw Configuration=SPDT, Voltage Rating (AC)=250V, Weight=12g, Width=16.5mm
P1: library part CMP-1502-01070-4, "THT Vertical Pin Header WR-PHD, Pitch 2.54 mm, Single Row, 6 pins", Color=Black, Contact Resistance=20mΩ, Current Rating=3A, Max Operating Temperature=105°C, Min Operating Temperature=-40°C, Operating Supply Voltage=250V, Connector Type="Male Pin", Contact Gender=Male, Contact Material=Gold, Contact Mating Length=5.9944mm, Contact Plating=Gold, Gender=Male, Height=8.89mm, Housing Material=PBT, Lead Free="Lead Free", Lead Pitch=2.54mm, Mount="Through Hole", Number of Contacts=6, Number of Pins=6, Number of Positions=6, Number of Rows=1, Orientation=Vertical, Packaging=Bulk, Pitch=2.54mm, RoHS=Compliant, Termination="Through Hole", Voltage Rating=250V
P2: library part CMP-1502-01095-5, "THT Vertical Pin Header WR-PHD, Pitch 2.54 mm, Single Row, 16 pins", Color=Black, Contact Resistance=20mΩ, Current Rating=3A, Max Operating Temperature=105°C, Min Operating Temperature=-40°C, Operating Supply Voltage=250V, Connector Type="Male Pin", Contact Material=Gold, Contact Mating Length=5.9944mm, Contact Plating=Gold, Gender=Male, Height=8.89mm, Lead Pitch=2.54mm, Mount="Through Hole", Number of Contacts=16, Number of Pins=16, Number of Positions=16, Number of Rows=1, Orientation=Vertical, Packaging=Bulk, Pitch=2.54mm, RoHS=Compliant, Termination=Solder, Voltage Rating=250V
P3 P4: library part CMP-1712-00002-7, "THT Vertical Pin Header WR-PHD, Pitch 2.54 mm, Single Row, 2 pins", Color=Black, Contact Resistance=20mΩ, Current Rating=3A, Max Operating Temperature=105°C, Min Operating Temperature=-40°C, Operating Supply Voltage=250V, Connector Type="Male Pin", Contact Gender=Male, Contact Material=Gold, Contact Mating Length=5.9944mm, Contact Plating=Gold, Gender=Male, Height=8.94mm, Housing Material=PBT, Lead Free="Lead Free", Lead Pitch=2.54mm, Mount="Through Hole", Number of Contacts=2, Number of Pins=2, Number of Positions=2, Number of Rows=1, Orientation=Vertical, Packaging=Bulk, Pitch=2.54mm, REACH SVHC=No, RoHS=Compliant, Termination="Through Hole", Voltage Rating=250V
Q1 Q2: library part CMP-1048-00766-2, Case/Package=SOT-23-3, Collector Base Voltage (VCBO)=50V, Collector Emitter Breakdown Voltage=45V, Collector Emitter Saturation Voltage=600mV, Continuous Collector Current=100mA, Emitter Base Voltage (VEBO)=6V, Frequency=100MHz, Manufacturer Lifecycle Status=ACTIVE, Max Junction Temperature (Tj)=150°C, Max Power Dissipation=300mW, Min Operating Temperature=-55°C, Power Dissipation=225mW, Collector Emitter Voltage (VCEO)=45V, Element Configuration=Single, Gain Bandwidth Product=100MHz, Halogen Free="Halogen Free", Height=1.01mm, hFE Min=420, Lead Free="Lead Free", Length=3.04mm, Lifecycle Status=Production, Max Breakdown Voltage=45V, Max Collector Current=100mA, Max Frequency=100MHz, Max Operating Temperature=150°C, NexarPartId=22133919, Number of Elements=1, Number of Pins=3, Packaging="Tape & Reel", Polarity=NPN, Radiation Hardening=No, RoHS=Compliant, Schedule B="8541210080, 8541210080", Transition Frequency=100MHz, Width=1.4mm
R1 R2 R11 R13 R14 R15: library part CMP-2100-03664-2, "RES 10K OHM 1% 1/10W 0603", Case Code (Imperial)=0603, Case Code (Metric)=1608, Max Operating Temperature=155°C, Max Power Dissipation=100mW, Min Operating Temperature=-55°C, Resistance=10kR, Resistance Tolerance=1%, Resistor Type="Thick Film", Temperature Coefficient=100ppm/°C, Voltage Rating=75V, Voltage Rating (DC)=50V, Case/Package=0603, Construction=Rectangular, Depth=0.8mm, Features="Moisture Resistant", Height=0.45mm, Lead Free="Lead Free", Lead Pitch=0.3mm, Length=1.6mm, Military Standard=Not, Number of Pins=2, Number of Terminations=2, Packaging="Tape and Reel", Power Rating=100mW, RoHS Compliant=Yes, Series=RC, Size Code=0603, Termination=SMD/SMT, Tolerance=1%, Weight=7.1E-05oz, Width=0.8mm
R3 R5 R7: library part CMP-2100-03667-1, "Chip Resistor, 0 Ohm, +/- 5%, 0.1 W, -55 to 155 degC, 0603 (1608 Metric), RoHS, Tape and Reel", Case Code (Imperial)=0603, Case Code (Metric)=1608, Manufacturer=Yageo, Max Operating Temperature=155degC, Min Operating Temperature=-55degC, Package Description="2-Pin Surface Mount Device, Body 1.6 x 0.8 mm", Package Quantity=5000, Power Rating=100mW, Resistance=0mOhm, Temperature Coefficient=200ppm/degreesC, Tolerance=5%, Voltage Rating=50V, Case/Package=0603, Composition=ThickFilm, Contact Plating=Tin, Datasheet URL=http://www.yageo.com/NewPortal/yageodocoutput?fileName=/pdf/R-Chip/PYu-RC_Group_51_RoHS_L_5.pdf, Datasheet Version="Rev. 5, 10/2016", Depth=0.8mm, Height=0.45mm, Lead Free=LeadFree, Length=1.6mm, Manufacturer URL=http://www.yageo.com/, Military Standard=Not, Number of Pins=2, Package Reference=0603, Packaging=TapeandReel, Radiation Hardening=No, REACH SVHC=NoSVHC, RoHSCompliant=true, Termination=SMD/SMT, Voltage Rating (DC)=50V, Width=0.8mm
R4 R6: library part CMP-1659-00020-2, "Chip Resistor, 330 Ohm, +/- 1%, 0.1 W, -55 to 155 degC, 0603 (1608 Metric), RoHS, Tape and Reel", Capacitance="47 uF", Case Code (Imperial)=2917, Case Code (Metric)=7343, Max Operating Temperature=125degC, Min Operating Temperature=-55degC, Package Quantity=500, Tolerance=10%, Voltage Rating="16 V", Case/Package=2917, ComponentLink1Description="Manufacturer URL", ComponentLink1URL=http://www.yageo.com/, ComponentLink2Description=Datasheet, ComponentLink2URL=http://www.yageo.com/documents/recent/PYu-RC_Group_51_RoHS_L_04.pdf, DatasheetVersion="Rev. 4, 02/2016", ESR="800 mohm", Height="3.1 mm", Length="7.3 mm", Mount="Surface Mount", PackageDescription="2-Pin Surface Mount Device, Body 1.6 x 0.8 mm", PackageReference=0603, Packaging="Tape and Reel", Pins=2, Radiation Hardening=No, REACH SVHC="No SVHC", RoHSCompliant=True, Voltage Rating (DC)="16 V", Width="4.3 mm"
R8: library part CMP-1747-00002-1, "Square Trimpot(R) Trimming Potentiometer, 1000 Ohm, -55 to 125 degC, 3-Pin THD, RoHS, Tube", Case Code (Imperial)=0603, Case Code (Metric)=1608, Max Operating Temperature="155 degC", Min Operating Temperature="-55 degC", Package Quantity=5000, Power Rating="100 mW", Resistance="4.7 kohm", Tolerance=1%, Voltage Rating="75 V", Case\Package=0603, ComponentLink1Description="Manufacturer URL", ComponentLink1URL=http://www.bourns.com/, ComponentLink2Description=Datasheet, ComponentLink2URL=http://www.bourns.com/docs/Product-Datasheets/3296.pdf, DatasheetVersion=May-16, Height="0.45 mm", Length="1.6 mm", Mount="Surface Mount", PackageDescription="3-Pin Through Hole Device, Body 9.53 x 4.83 mm, Pitch 2.54 mm", PackageReference=3296W-1-3, Packaging="Tape and Reel", Pins=2, Radiation Hardening=No, REACH SVHC=Yes, RoHSCompliant=true, Weight="7.1E-05 oz", Width="0.8 mm"
R9 R10 R12: library part CMP-1659-00009-5, "RES 1K OHM 1% 1/10W 0603", Case Code (Imperial)=0603, Case Code (Metric)=1608, Max Operating Temperature=155°C, Max Power Dissipation=100mW, Min Operating Temperature=-55°C, Resistance=1kR, Resistance Tolerance=1%, Resistor Type="Thick Film", Temperature Coefficient=100ppm/°C, Voltage Rating=50V, Case/Package=0603, Construction=Rectangular, Contact Plating=Tin, Depth=0.8mm, Features="Moisture Resistant", Height=0.45mm, Lead Free="Lead Free", Length=1.6mm, Military Standard=Not, Number of Terminations=2, Packaging="Tape and Reel", Power Rating=100mW, Radiation Hardening=No, REACH SVHC="No SVHC", RoHS Compliant=Yes, Series=RC, Size Code=0603, Technology="THICK FILM", Termination=SMD/SMT, Tolerance=1%
R16 R17 R18 R20 R21 R22: library part CMP-03412-006130-1, "RES SMD 6.2K OHM 5% 1/4W 1206", Manufacturer=Yageo, Manufacturer Part Number=AC1206JR-076K2L, Package=AC1206, Power Rating=0.25W, Resistance=6.2KΩ, Temperature="-55°C to +155°C", Temperature Range High=+155°C, Temperature Range Low=-55°C, Tolerance=0.05, Voltage Rating=200V, Automotive=Yes, Automotive Grade="Grade 0", Category=Res, ComponentLink2Description=Datasheet, ComponentLink2URL=http://www.yageo.com/NewPortal/yageodocoutput?fileName=/pdf/R-Chip/PYu-AC_51_RoHS_L_6.pdf, Composition="Thick Film", Device Class L1="Passive Components", Device Class L2=Resistors, Device Class L3="Chip SMD Resistors", Digikey Description="RES SMD 6.2K OHM 5% 1/4W 1206", Footprint Url=http://www.yageo.com/exep/pages/download/literatures/PYu-R_Mount_10.pdf, Height=0.65mm, Ipc Land Pattern Name=RESC310160X55, Lead Free=Yes, Mouser Description="Thick Film Resistors - SMD 1/4W 6.2K ohm 5% AEC-Q200", Octopart=https://octopart.com/ac1206jr-076k2l-yageo-30511322, RoHS=TRUE, Series=AC
R19 R23: library part CMP-1747-00001-8, "TRIMMER 10K OHM 0.5W PC PIN TOP", Color=Blue, Insulation Resistance=1GR, Max Operating Temperature=125°C, Max Power Dissipation=500mW, Min Operating Temperature=-55°C, Package Quantity=50, Resistance=10kR, Resistance Tolerance=10%, Resistor Type=Cermet, Temperature Coefficient=100ppm/°C, Contact Plating=Tin, Depth=4.83mm, Height=11.55mm, Lead Free="Lead Free", Length=9.53mm, Military Standard=Not, Mount="Through Hole", Number of Turns=25, Packaging=Rail/Tube, Power Rating=500mW, Radiation Hardening=No, Reach SVHC Compliant=Yes, RoHS Compliant=Yes, Series=3296, Taper=Linear, Technology=CERMET, Termination=Pin, Tolerance=10%, Weight=0.03oz, Width=9.53mm
U1: library part CMP-0299-00399-2, "3-V to 5.5-V Multichannel RS-232 Line Driver / Receiver with ±15-kV ESD Protection, 0 to 70 degC, 16-Pin SOIC (D), Green (RoHS & no Sb/Br)", Drivers Per Package=2, Supply Voltage(s)(V)="3.3 or 5.0", ComponentLink1Description="Manufacturer URL", ComponentLink1URL=www.ti.com, ComponentLink2Description=Datasheet, ComponentLink2URL=http://www.ti.com/general/docs/lit/getliterature.tsp?genericPartNumber=MAX3232&fileType=pdf, ComponentLink3Description="Package Specification", ComponentLink3URL=http://www.ti.com/litv/pdf/mpds178g, DatasheetVersion=SLLS410I, ESD HBM(kV)=+/-15, ICC(Max)(mA)=1, PackageDescription="16-Pin Plastic Small Outline Integrated Circuit, 9.9 x 3.9 mm, Pitch 1.27 mm Pitch", PackageReference=D0016A, PackageVersion="revM, Jun-2011", Receivers Per Package=2, RS-232=TRUE, Single Supply=TRUE, SubFamily=RS-232
U2: library part CMP-0316-00103-2, "Low-Power RS-485 Transceiver, 0.2 Mbps, 5 V, Half Duplex, -40 to 85 degC, 8-pin MSOP (DGK), Green (RoHS & no Sb/Br)", Drivers Per Package=1, Manufacturer="Texas Instruments", Rating=Catalog, Supply Voltage(s)(V)=5, # of TX/RX="1 TX / 1 RX", Code_JEDEC=MO-187-AA, Common Mode Range="-7 to 12", ComponentLink1Description=Datasheet, ComponentLink1URL=http://www.ti.com/general/docs/lit/getliterature.tsp?genericPartNumber=SN65HVD3082E&fileType=pdf, ComponentLink2Description="Package Specification", ComponentLink2URL=http://www.ti.com/litv/pdf/msoi002j, DatasheetVersion=SLLS562G, Duplex=Half, Eco-Plan="Green (RoHS & no Sb/Br)", ESD(kV)=15, Fail Safe="Idle, Open, Short", Fault Protection(V)="-9 to 14", ICC(Max)(mA)=0.9, Isolated=No, Mounting Technology="Surface Mount", Number of Nodes=256, PackageDescription="8-Pin Thin Small Outline Package 3 x 3 mm Body ,0.65 mm Pitch", PackageReference=DGK0008A, PackageVersion="revE, May-2006", PartNumber=SN65HVD3082EDGKR, Receivers Per Package=1, Signaling Rate(Mbps)=0.2, SubFamily=RS-485
U3: library part CMP-12105-000129-1, "IC MCU 32BIT 256KB FLASH 48LQFP", Case/Package=LQFP, Frequency=48MHz, Max Operating Temperature=85°C, Min Operating Temperature=-40°C, Core Architecture=ARM, Interface=I2C, Memory Size=256KB, Memory Type=FLASH, Number of I/Os=39, Number of Pins=48, Oscillator Type=Internal, Packaging="Cut Tape", Peripherals=POR, RoHS Compliant=Yes
U4 U5: library part CMP-1310-00291-2, "IC OPAMP GP 2 CIRCUIT 8SOIC", Case/Package=SOIC, Dual Supply Voltage=9V, Input Bias Current=250nA, Input Offset Voltage (Vos)=7mV, Max Dual Supply Voltage=16V, Max Operating Temperature=70°C, Max Supply Voltage=32V, Min Dual Supply Voltage=1.5V, Min Operating Temperature=0°C, Min Supply Voltage=3V, Nominal Supply Current=1.2mA, Operating Supply Current=1.5mA, Output Current=40mA, Package Quantity=2500, Power Supply Rejection Ratio (PSRR)=65dB, Voltage Gain=100dB, Bandwidth=1MHz, Common Mode Rejection Ratio=65dB, Contact Plating=Tin, Gain Bandwidth Product=1MHz, Halogen Free="Halogen Free", Height=1.5mm, Lead Free="Lead Free", Length=5mm, Number of Amplifiers=2, Number of Channels=2, Number of Circuits=2, Number of Elements=2, Number of Pins=8, Operating Supply Voltage=16V, Output Current per Channel=40mA, Packaging="Tape and Reel", Radiation Hardening=No, REACH SVHC="No SVHC", Slew Rate=0.6V/µs, Width=4mm
U6: library part CMP-0062-00684-3, "800mA Low-Dropout Linear Regulator, 3-pin TO-252, Pb-Free", Manufacturer="Texas Instruments", PackageTopMarking=NSUZXYTT*LM1117*DT-1.8, PowerWise=N, Code_JEDEC=TO-252-AA, ComponentLink1Description="Datasheet URL", ComponentLink1URL=http://www.ti.com/general/docs/lit/getliterature.tsp?genericPartNumber=LM1117-N&fileType=pdf, CompType="LDO IC", PackageDescription="TO252, Molded, Jedec, 6.8 x 6.10 x 2.30mm Body, 3 Lead, 2.28mm Pitch, Surface Mount", PackageReference=NDP0003B, PinCount=3, RoHS=Y
U7: library part CMP-0244-00474-1, "Positive Voltage Regulator, 5V, 3-Pin TO-220FP", ComponentLink1Description="Manufacturer URL", ComponentLink1URL=http://www.st.com, ComponentLink2Description=Datasheet, ComponentLink2URL=http://www.st.com/internet/com/TECHNICAL_RESOURCES/TECHNICAL_LITERATURE/DATASHEET/CD00000444.pdf, DatasheetVersion=16/11/2011, PackageDescription="TO, Thru-Hole, Vertical, Heatsink Mounted; 3 In-Line Leads; Pitch 2.54 mm", PackageReference=TO220FP, PackageVersion=2011
U8: library part CMP-04917-000197-1, "IC REG LINEAR 12V 1.5A", Case/Package=TO-263, Dropout Voltage=2V, Max Operating Temperature=125°C, Min Operating Temperature=0°C, Quiescent Current=8mA, Lead Free="Contains Lead", RoHS Compliant=Yes
Y1: library part CMP-27762-013666-1, "Crystal 14.31818MHz ±30ppm 18pF SMD-2 8mm x 4.5mm", Case/Package=CSMD, ESR (Equivalent Series Resistance)=60R, Frequency=14.31818MHz, Frequency Stability=30ppm, Load Capacitance=18pF, Max Operating Temperature=85°C, Min Operating Temperature=-40°C, Package Quantity=1000, Resistor Type=Ceramic, Depth=4.5mm, Frequency Tolerance=30ppm, Height=0.063inch, Length=8mm, Mount="Surface Mount", Number of Pins=2, Packaging="Tape and Reel", Radiation Hardening=No, Series=ABM2, Termination=SMD/SMT, Tolerance=30ppm, Width=0.177inch

## Free pads (board coordinates)
  round 3.5 hole 3.2: 2(5,5) 2(5,105) 2(100,5) 2(100,105)

## Via types
v1: diameter 1.27, hole 0.711, Top Layer to Bottom Layer, 49 vias

## Nets (pads, with @x,y where several pads share a name; then routed paths per layer and width w, separated by ;. In a path a pad name is that pad's centre, name@x,y a point inside that pad or via, vN(x,y) a via of type N, cw(c..) or ccw(c..) an arc to the next point about the centre after c; other vN are vias at no path point)
+3.3: C5.2 C7.1 C8.1 C9.1 C10.1 C18.2 J3.1 J4.1 R12.1 R13.2 R14.2 U1.16 U3.1 U3.9 U3.24 U3.36 U3.48 U6.4 | length 178.2
  Top Layer w0.3: J3.1 27.644,56 v1(53.2,56) ; R13.2 36.677,39.077 v1(37,39.4) ; v1(48.6,41.4) 48.7,41.5 48.7,43.023 R12.1 ; v1(56.2,45.2) 56.755,45.755 U1.16 ; v1(58.8,33.4) R14.2
  Top Layer w0.5: U6.4 60.85,98.6 C18.2 77.4,98.6 J4.1
  Layer 2 w0.5: v1(53.2,56) 53.2,74.4 J4.1
  Bottom Layer w0.3: C10.1 38.55,39.75 39,39.3 39,33.975 U3.48 ; v1(41.425,23.625) 42.675,22.375 C9.1 ; v1@41.45,23.65 U3.36 ; U3.1 41.45,33.554 40.846,32.95 44.85,32.95 45.306,33.407 ; 45.306,33.407 45.45,33.551 45.45,36.25 46.525,37.325 46.525,38.45 ; U3.24 53.25,27.45 53.8,28 v1(53.8,29.8) 53.875,29.8 54.95,30.875 C8.1 ; v1(56.2,45.2) 59.6,48.6 63.824,48.6 64,48.776 64,50.6 65.325,51.925 C5.2
  other v1: 46.4,37.2
+5: C6.1 C14.1 C15.1 C21.2 DS1.2 DS2.1 DS3.2 DS4.1 J6.1 P1.5 P2.2 R1.2 R2.2 R7.1 R8.2 R19.3 R23.3 U2.8 U7.3 | length 252.2
  Top Layer w0.3: R7.1 45.95,7.55 48,9.6 62.2,9.6 62.2,9.2 R8.2 ; R2.2 R1.2 87.208,55.068 91.392,55.068 P1.5
  Top Layer w0.5: U2.8 24.425,10.975 25.303,11.853 25.653,11.853 v1(25.8,12) 25.947,11.853 26.997,11.853 31.3,7.55 R7.1 ; v1(26.2,27) C15.1 ; v1(26.8,51) C14.1 ; U7.3 65.185,84.94 66.125,84 C21.2 66.4,84.2 77.8,84.2 J6.1 J6.1@78.063,84.463 ; R8.2 63.4,7.784 64.18,7.004 P2.2
  Layer 2 w0.5: R19.3 18.52,61.12 27.2,69.8 34.6,69.8 71.6,106.8 80.707,106.8 81,106.507 81,90.2 75.2,84.4
  Bottom Layer w0.3: J6.1 93.6,84.4 96.4,81.6 96.4,56.4 95.06,55.06 P1.5
  Bottom Layer w0.5: C6.1 22.85,13.35 24.6,15.1 v1(24.6,17)
+12: C24.2 D1.1 D3.1 J7.1 K1.2 K2.2 U8.3 | length 104.7
  Top Layer w0.5: U8.3 59.74,60.27 60.025,60.555 61.08,60.555 C24.2@68.125,67.6 ; C24.2 68.267,67.667 76.975,67.667 J7.1
  Layer 2 w0.3: D3.1 69.76,13 K2.2 81.4,19.3 81.4,32.6 ; D1.1 73.74,33.76 K1.2 81.4,32.6 ; J7.1 81.4,63.375 81.4,32.6
GND: C3.2 C4.2 C5.1 C6.2 C7.2 C8.2 C9.2 C10.2 C11.2 C12.2 C13.2 C16.2 C17.1 C18.1 C19.2 C20.1 C21.1 C22.2 C23.1 C24.1 D5.2 D6.2 D7.2 J3.4 J3.5 J3.6 J4.2 J6.2 J7.2 P1.4 P2.1 P2.5 P2.16 Q1.2 Q2.2 R8.1 U1.15 U2.5 U3.8 U3.23 U3.35 U3.47 U4.4 U5.4 U6.1 U7.2 U8.2 U8.4 | length 230.6
  Top Layer w0.3: v1(17.6,16.6) 17.6,18.611 U5.4 ; v1(17.796,39.653) 17.796,42.007 U4.4 ; v1@25.575,9.025 v1@25.8,8.8 ; C11.2 45.512,43.913 45.512,42.287 v1(45.6,42.2) ; v1(56,47) 56.025,47.025 U1.15 ; C4.2 66.675,53.6 v1(68.4,53.6)
  Top Layer w0.5: D6.2 34.149,85.4 35.149,84.4 C19.2 ; D5.2 C16.2 35.3,100.3 47.1,100.3 C17.1 51.895,100.2 53.375,101.68 U6.1 ; U2.5 23.95,9 25.6,9 v1(25.688,8.913) ; D7.2 27.4,74.2 C22.2 45.925,67.4 47.125,66.2 C23.1 53,66.2 U8.4 U8.2 ; C20.1 55.048,83.2 55.848,82.4 U7.2 ; C21.1 J6.2@78.355,82.4 ; C24.1 76.267,69.2 76.801,69.734 J7.2 ; C18.1 73.6,100.2 74.8,101.4 J4.2
  Bottom Layer w0.3: v1(17.6,16.6) 20.95,16.6 22.75,14.8 C6.2 ; C22.2 46.15,55.45 46.875,55.45 C13.2 40.8,55.125 C12.2 ; v1(37.8,36.4) 37.8,33.849 39.056,32.594 ; 39.056,32.594 39.2,32.45 U3.47 ; C10.2 43.725,39.8 45.075,38.45 45.075,37.275 v1(44.6,36.8) 44.6,36.538 44.95,36.188 U3.8 ; C9.2 43.8,21.525 43.8,22.461 41.95,24.311 U3.35 41.952,26.027 41.952,26.852 43.05,27.95 U3.23 51.15,27.95 52,28.8 52,29.375 54.95,32.325 C8.2 56.075,32.325 58.45,29.95 Q1.2 v1(59.2,32) ; v1(58,23.2) 58.4,22.8 Q2.2 ; C3.2 C5.1 ; C5.1@66.45,50.475 68.4,52.425 v1(68.4,53.6)
NetC1_1: C1.1 U1.5 | length 6.2
  Top Layer w0.3: U1.5 63.375,50.835 64.8,49.41 64.8,47.4 65.275,46.925 C1.1
NetC1_2: C1.2 U1.3 | length 5.3
  Top Layer w0.3: U1.3 63.375,48.295 64.4,47.27 64.4,46 64.925,45.475 C1.2
NetC2_1: C2.1 U1.4 | length 7.7
  Top Layer w0.3: U1.4 62.675,49.565 61.6,50.64 61.6,51.024 61.886,51.31 64.09,51.31 64.199,51.201 65.475,49.925 C2.1
NetC2_2: C2.2 U1.1 | length 8.8
  Top Layer w0.3: U1.1 63.375,45.755 64.33,44.8 67.024,44.8 67.2,44.976 67.2,48.224 66.651,48.224 C2.2
NetC3_1: C3.1 U1.2 | length 9.3
  Top Layer w0.3: v1(60.2,47.2) 61.574,47.2 61.749,47.025 U1.2
  Bottom Layer w0.3: v1(60.2,47.2) 60.65,46.75 C3.1
NetC4_1: C4.1 U1.6 | length 5.7
  Top Layer w0.3: U1.6 63.375,52.105 64.8,53.53 64.8,55.149 64.976,55.325 C4.1
NetC11_1: C11.1 R12.2 U3.7 | length 13.6
  Top Layer w0.3: v1(43.4,38) 46.975,41.575 C11.1 48.247,44 48.723,44.477 R12.2
  Bottom Layer w0.3: v1(43.4,38) 43.373,37.973 43.373,36.765 44.448,35.69 44.448,34.378 U3.7
NetC12_1: C12.1 U3.3 Y1.1 | length 20.5
  Top Layer w0.3: v1(40.4,37.8) 40.4,37.974 41.08,38.654 41.08,41.746 40.4,42.426 v1(40.4,42.6)
  Bottom Layer w0.3: v1(40.4,37.8) 40.6,37.8 42.45,35.95 U3.3 ; v1(40.4,42.6) 40.4,49 Y1.1 ; Y1.1@40.6,49.45 C12.1
NetC13_1: C13.1 U3.4 Y1.2 | length 22.1
  Top Layer w0.3: v1(42,38.6) 42.186,38.786 42.186,39.432 42.34,39.586 42.34,39.835 42,40.175 v1(42,41.4)
  Bottom Layer w0.3: v1(42,38.6) 42,36.895 42.8,36.095 42.8,35.356 42.806,35.349 42.806,35.344 42.95,35.2 U3.4 ; v1(42,41.4) 42.085,41.485 42.085,42.485 46,46.4 46,48.1 Y1.2 47.2,49.3 C13.1
NetC14_2: C14.2 U4.8 | length 7.9
  Top Layer w0.5: U4.8 24.305,45.905 27.8,49.4 C14.2
NetC15_2: C15.2 U5.8 | length 7.5
  Top Layer w0.5: U5.8 24.316,22.505 27.125,25.314 28.514,25.314 C15.2
NetC16_1: C16.1 C17.2 D5.1 U6.3 | length 34.1
  Top Layer w0.5: D5.1 34.2,96.4 C16.1 43.925,95.4 47.125,98.6 C17.2 51.895,98.6 53.375,97.12 U6.3
NetC19_1: C19.1 C20.2 D6.1 U7.1 | length 37.4
  Top Layer w0.5: D6.1 33.2,81.4 C19.1 44.925,79.4 C20.2@47.125,81.6 ; C20.2 47.275,81.6 49.015,79.86 U7.1
NetC22_1: C22.1 C23.2 D7.1 U8.1 | length 36.6
  Top Layer w0.5: D7.1 26.4,70.2 C22.1 44.925,62.4 47.125,64.6 C23.2 50.33,64.6 54.66,60.27 U8.1
NetD1_2: D1.2 K1.5 Q1.3 | length 24.8
  Bottom Layer w0.3: Q1.3 61.2,36.84 D1.2 72.94,42.64 K1.5
NetD2_1: D2.1 U3.46 | length 5.8
  Top Layer w0.3: D2.1 36.3,34.1 v1(37.2,33.2)
  Bottom Layer w0.3: v1(37.2,33.2) 37.386,33.014 37.386,32.214 37.65,31.95 U3.46
NetD2_2: D2.2 R13.1 | length 6.4
  Top Layer w0.3: R13.1 29.677,37.723 32.6,34.8 D2.2
NetD3_2: D3.2 K2.5 Q2.3 | length 16.6
  Bottom Layer w0.3: Q2.3 61.96,20.4 D3.2 66.62,25.02 75.08,25.02 K2.5
NetD4_1: D4.1 U3.21 | length 11.8
  Top Layer w0.3: v1(53,35.4) 53.126,35.526 53.976,35.526 D4.1
  Bottom Layer w0.3: U3.21 50.35,28.95 52.2,30.8 52.2,35.4 v1@52.8,35.4
NetD4_2: D4.2 R14.1 | length 2.8
  Top Layer w0.3: D4.2 56.427,36.477 R14.1
NetD5_3: D5.3 J5.1 | length 15.1
  Top Layer w0.5: J5.1 6.87,91.1 15.725,99.955 15.725,100.225 15.9,100.4 D5.3
NetD5_4: D5.4 J5.2 | length 14.3
  Top Layer w0.5: J5.2 5.24,88.6 8.1,88.6 15.9,96.4 D5.4
NetD6_3: D6.3 J5.3 | length 10.3
  Top Layer w0.5: J5.3 9.834,86.02 10.454,85.4 D6.3
NetD6_4: D6.4 J5.4 | length 10.9
  Top Layer w0.5: J5.4 12.82,83.48 14.9,81.4 D6.4
NetD7_3: D7.3 J5.5 | length 18.5
  Top Layer w0.5: J5.5 10.711,80.94 13.251,78.4 18.357,78.4 18.65,78.107 D7.3
NetD7_4: D7.4 J5.6 | length 18.8
  Top Layer w0.5: J5.6 9.681,78.4 12.481,75.6 16.307,75.6 16.6,75.307 16.6,72.25 18.125,70.725 18.125,70.375 18.3,70.2 D7.4
NetDS1_1: DS1.1 R18.1 U4.3 | length 18.3
  Top Layer w0.5: DS1.1 9.14,49.86 R18.1 9.2,44.8 10.635,43.365 U4.3
NetDS2_2: DS2.2 R17.1 | length 4.2
  Top Layer w0.5: DS2.2 9.34,37.86 R17.1
NetDS3_1: DS3.1 R22.1 U5.3 | length 19.4
  Top Layer w0.5: DS3.1 9.27,27.13 R22.1 9.4,20.258 9.693,19.965 U5.3
NetDS4_2: DS4.2 R21.1 | length 5.4
  Top Layer w0.5: DS4.2 9.54,13.66 R21.1
NetJ1_1: J1.1 K1.3 | length 12.9
  Bottom Layer w0.3: K1.3 92.4,32.6 J1.1
NetJ1_2: J1.2 K1.4 | length 12.6
  Top Layer w0.3: K1.4 93.2,44.6 J1.2
NetJ1_3: J1.3 K1.1 | length 26.3
  Bottom Layer w0.3: K1.1 94.4,38.6 J1.3
NetJ2_1: J2.1 K2.3 | length 13
  Bottom Layer w0.3: K2.3 93.8,13 J2.1
NetJ2_2: J2.2 K2.4 | length 13.3
  Bottom Layer w0.3: K2.4 92.7,19.6 J2.2
NetJ2_3: J2.3 K2.1 | length 26.4
  Top Layer w0.3: K2.1 95.8,19 J2.3
NetJ3_2: J3.2 U3.42 | length 52
  Bottom Layer w0.3: J3.2 33.103,48.041 33.103,30.126 33.279,29.95 U3.42
NetJ3_3: J3.3 U3.41 | length 51.4
  Bottom Layer w0.3: J3.3 19.113,60.031 19.451,60.031 31.8,47.683 31.8,30 32.576,29.224 32.824,29.224 33.05,29.45 U3.41
NetP1_2: P1.2 R4.1 | length 4
  Bottom Layer w0.3: R4.1 87.8,63.419 88.539,62.68 P1.2
NetP1_3: P1.3 R1.1 R2.1 R6.1 | length 24.9
  Top Layer w0.3: R2.1 R1.1 v1(87.2,52.2)
  Bottom Layer w0.3: v1(87.2,52.2) 82.376,52.2 82.2,52.376 82.2,55.905 82.495,56.2 84.22,56.2 88.16,60.14 ; R6.1 87.8,60.5 88.16,60.14 ; P1.3 88.16,60.14
NetP2_3: P2.3 R8.3 | length 6.7
  Top Layer w0.5: R8.3 60.86,2.678 61.64,1.898 P2.3
NetP2_4: P2.4 U3.30 | length 33.5
  Bottom Layer w0.3: U3.30 44.45,24.286 49.6,19.136 49.6,5.976 51.076,4.5 56.2,4.5 P2.4
NetP2_6: P2.6 U3.31 | length 29.5
  Bottom Layer w0.3: U3.31 43.95,24.291 48.6,19.641 48.6,5.4 49.85,4.15 51.47,4.15 P2.6
NetP2_7: P2.7 U3.32 | length 29.1
  Bottom Layer w0.3: U3.32 43.45,24.296 47.8,19.946 47.8,3.976 47.976,3.8 50.2,3.8 50.6,3.4 50.6,2.488 51.48,1.608 P2.7
NetP2_8: P2.8 U3.33 | length 26.9
  Bottom Layer w0.3: U3.33 42.95,24.301 47,20.251 47,3.54 P2.8
NetP2_9: P2.9 U3.34 | length 26.1
  Bottom Layer w0.3: U3.34 42.45,24.306 46.4,20.356 P2.9
NetP2_10: P2.10 U3.37 | length 33.2
  Top Layer w0.3: v1(34.8,21) 34.8,19.2 v1@43.6,10.4
  Bottom Layer w0.3: v1(34.8,21) 34.8,25.2 v1(37.2,27.6) ; v1@37.35,27.45 U3.37 ; v1(43.6,10.2) 43.73,10.07 43.73,1.73 P2.10
NetP2_15: P2.15 R7.2 | length 4.5
  Top Layer w0.5: P2.15 31.28,1.72 31.28,5.93 R7.2
NetP3_1: P3.1 U2.6 | length 9.3
  Top Layer w0.3: P3.1 22.6,1.86 22.6,9.4 22.875,9.675 U2.6
NetP3_2: P3.2 U2.7 | length 11
  Top Layer w0.3: P3.2 22,3.8 22,9.4 22.85,10.25 23.85,10.25 U2.7
NetP4_1: P4.1 U1.14 | length 26.1
  Top Layer w0.3: U1.14 58.125,48.295 59.83,50 60.6,50 61,50.4 61,55.824 61.176,56 70.8,56 72,54.8 72,54.33 P4.1
NetP4_2: P4.2 U1.13 | length 25.1
  Top Layer w0.3: U1.13 58.125,49.565 59.6,51.04 59.6,56.6 60,57 71.87,57 P4.2
NetQ1_1: Q1.1 R11.2 | length 3.1
  Bottom Layer w0.3: R11.2 56.277,28.323 56.456,28.144 56.533,28.144 56.627,28.05 Q1.1
NetQ2_1: Q2.1 R15.2 | length 4.4
  Bottom Layer w0.3: R15.2 57.6,20.2 58.35,19.45 Q2.1
NetR3_1: R3.1 R9.1 U3.12 | length 62.2
  Top Layer w0.3: R9.1 20.077,13.677 24.4,18 29.6,18 v1(42.6,31) ; v1(51,52) 52.45,52 R3.1
  Bottom Layer w0.3: v1(42.6,31) 42.663,30.937 43.685,30.937 43.822,30.8 44.581,30.8 46.948,33.167 46.948,34.373 U3.12 46.95,35.874 50.2,39.124 50.2,51.824 50.376,52 v1(51,52)
NetR3_2: R3.2 U1.11 | length 3.7
  Top Layer w0.3: R3.2 54.245,52.105 U1.11
NetR4_2: R4.2 U3.14 | length 55.3